# Altium PCB barricelli.PcbDoc (part 1 of 5)
Units mm, origin at the board's own origin, x right, y up, seen from the top; angles counter-clockwise.
Board outline 153 x 153 mm, 8 copper layers (Top Layer, PWR, Mid-Layer 1, Mid-Layer 2, Mid-Layer 3, Mid-Layer 4, GND, Bottom Layer); 168 components, 427 nets, 1233 pads, 911 vias.
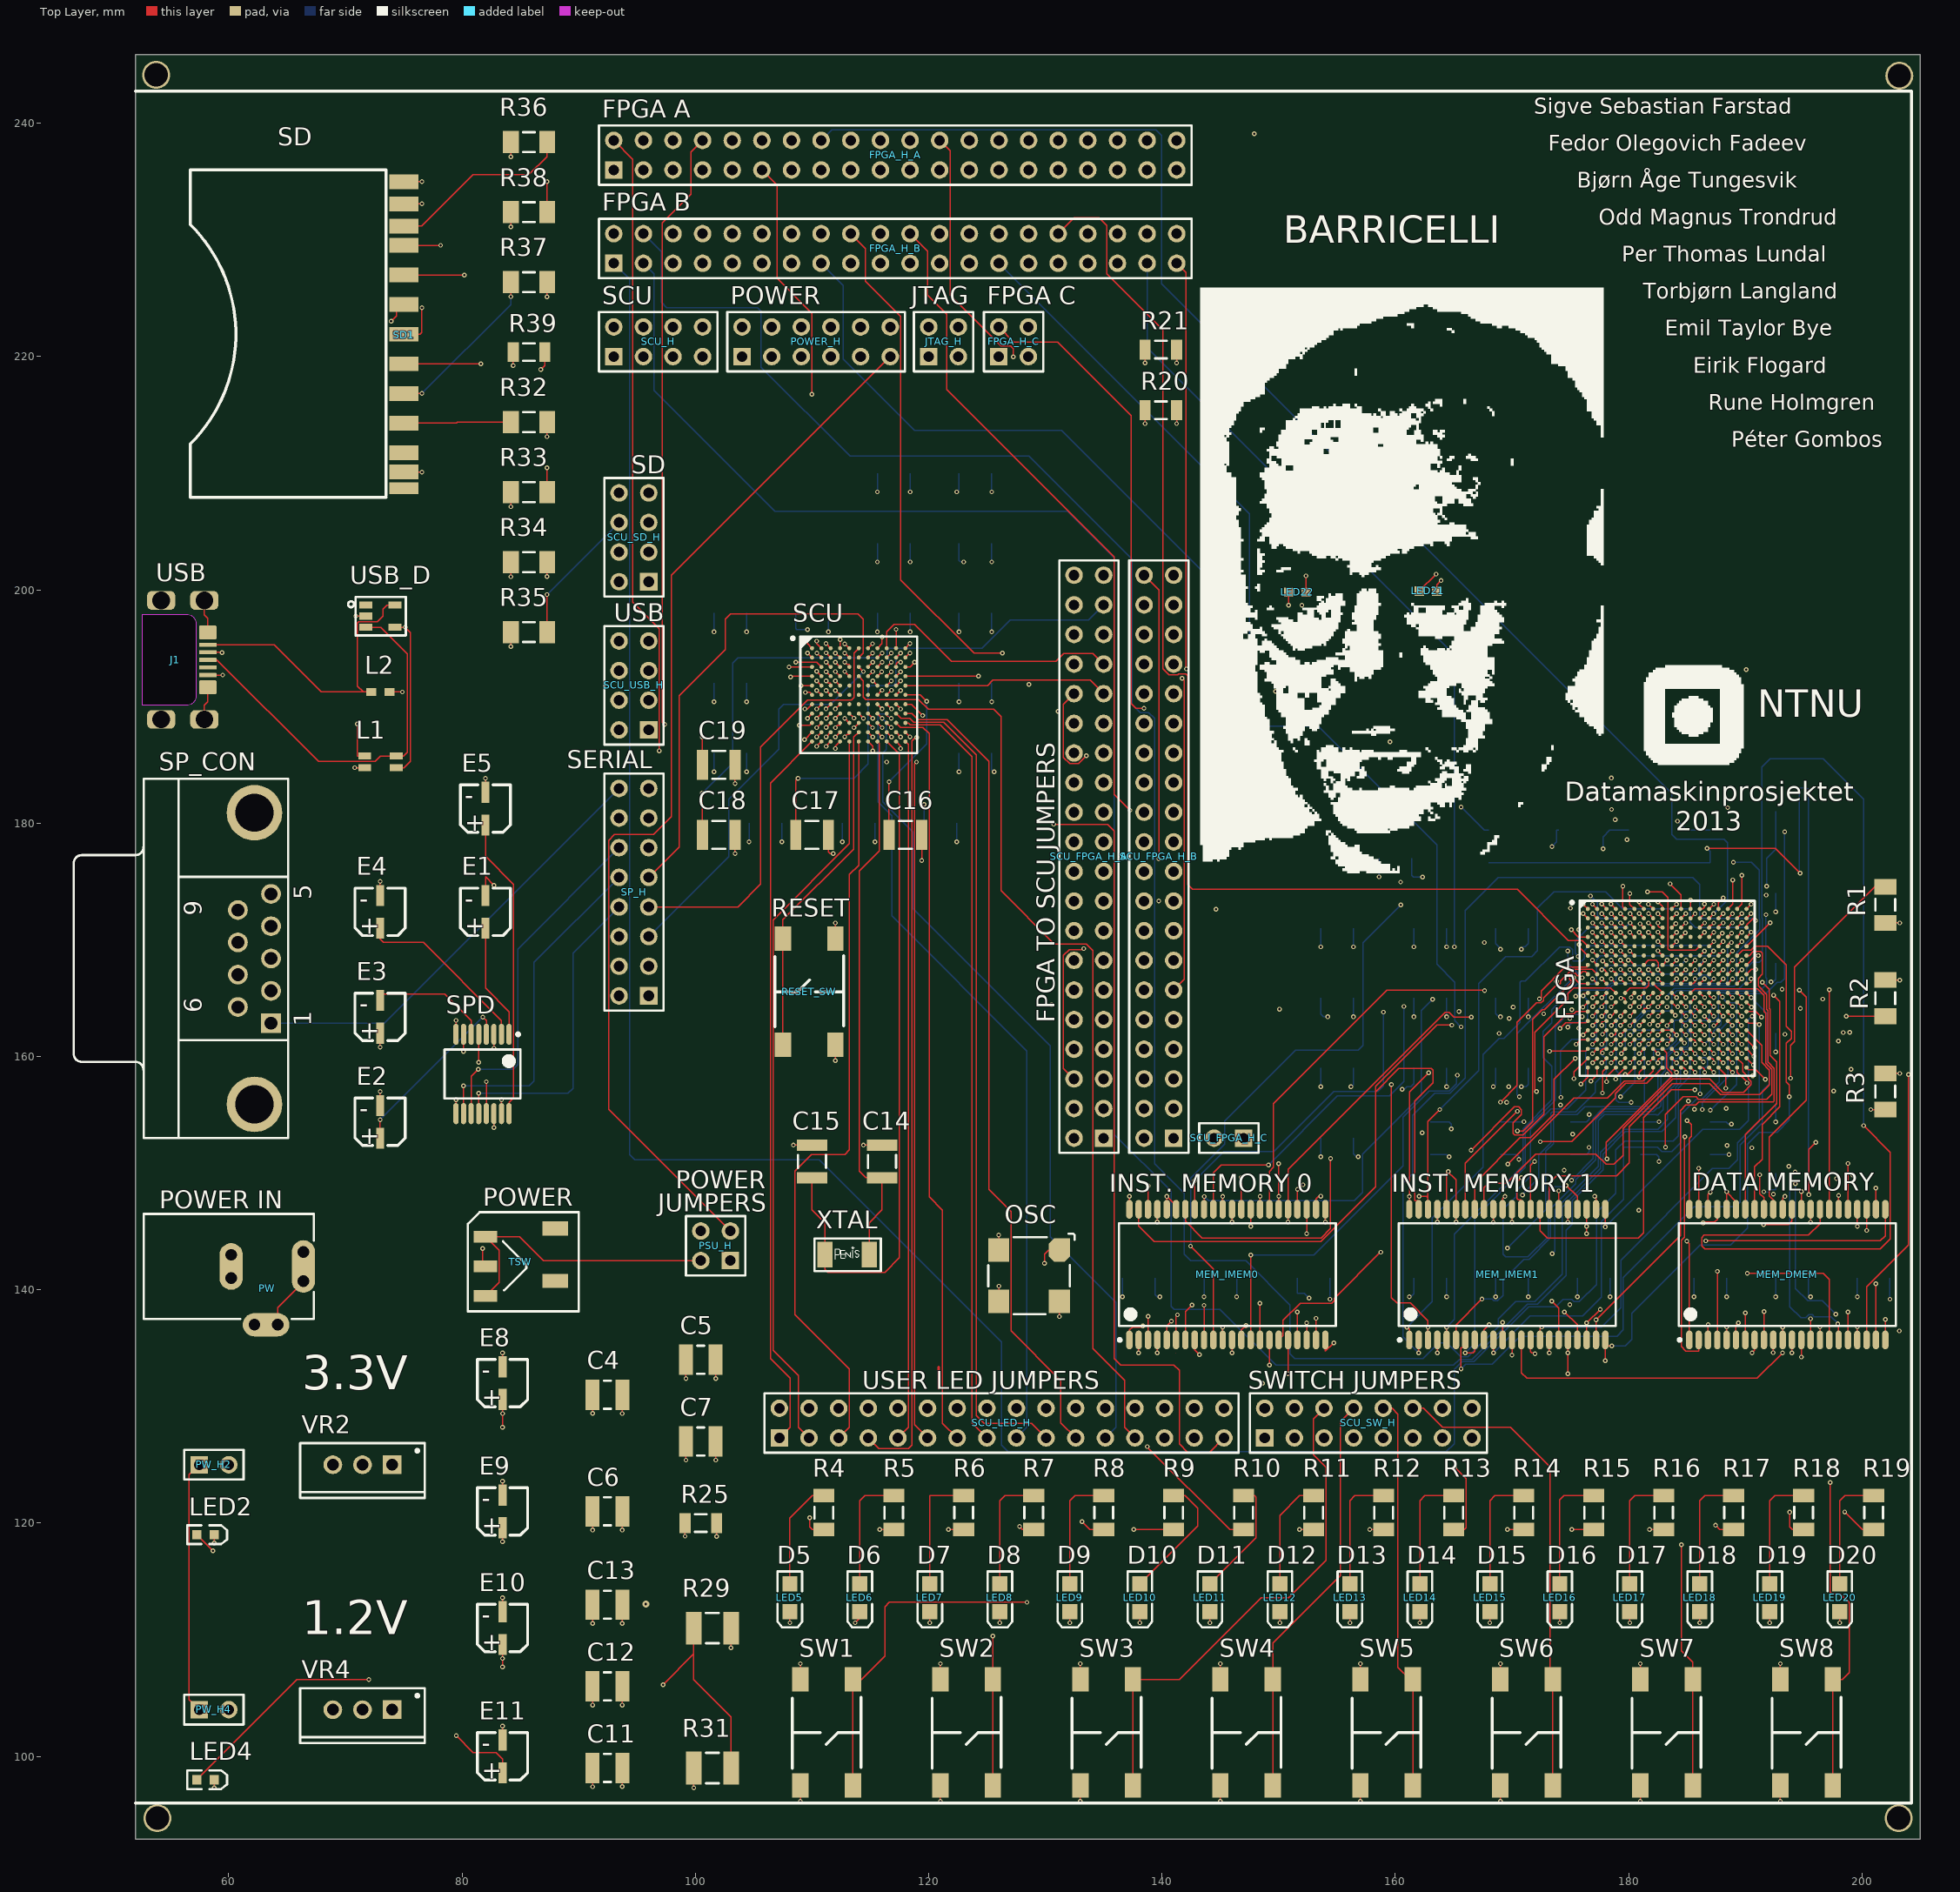
[diagram p0: Top Layer view]
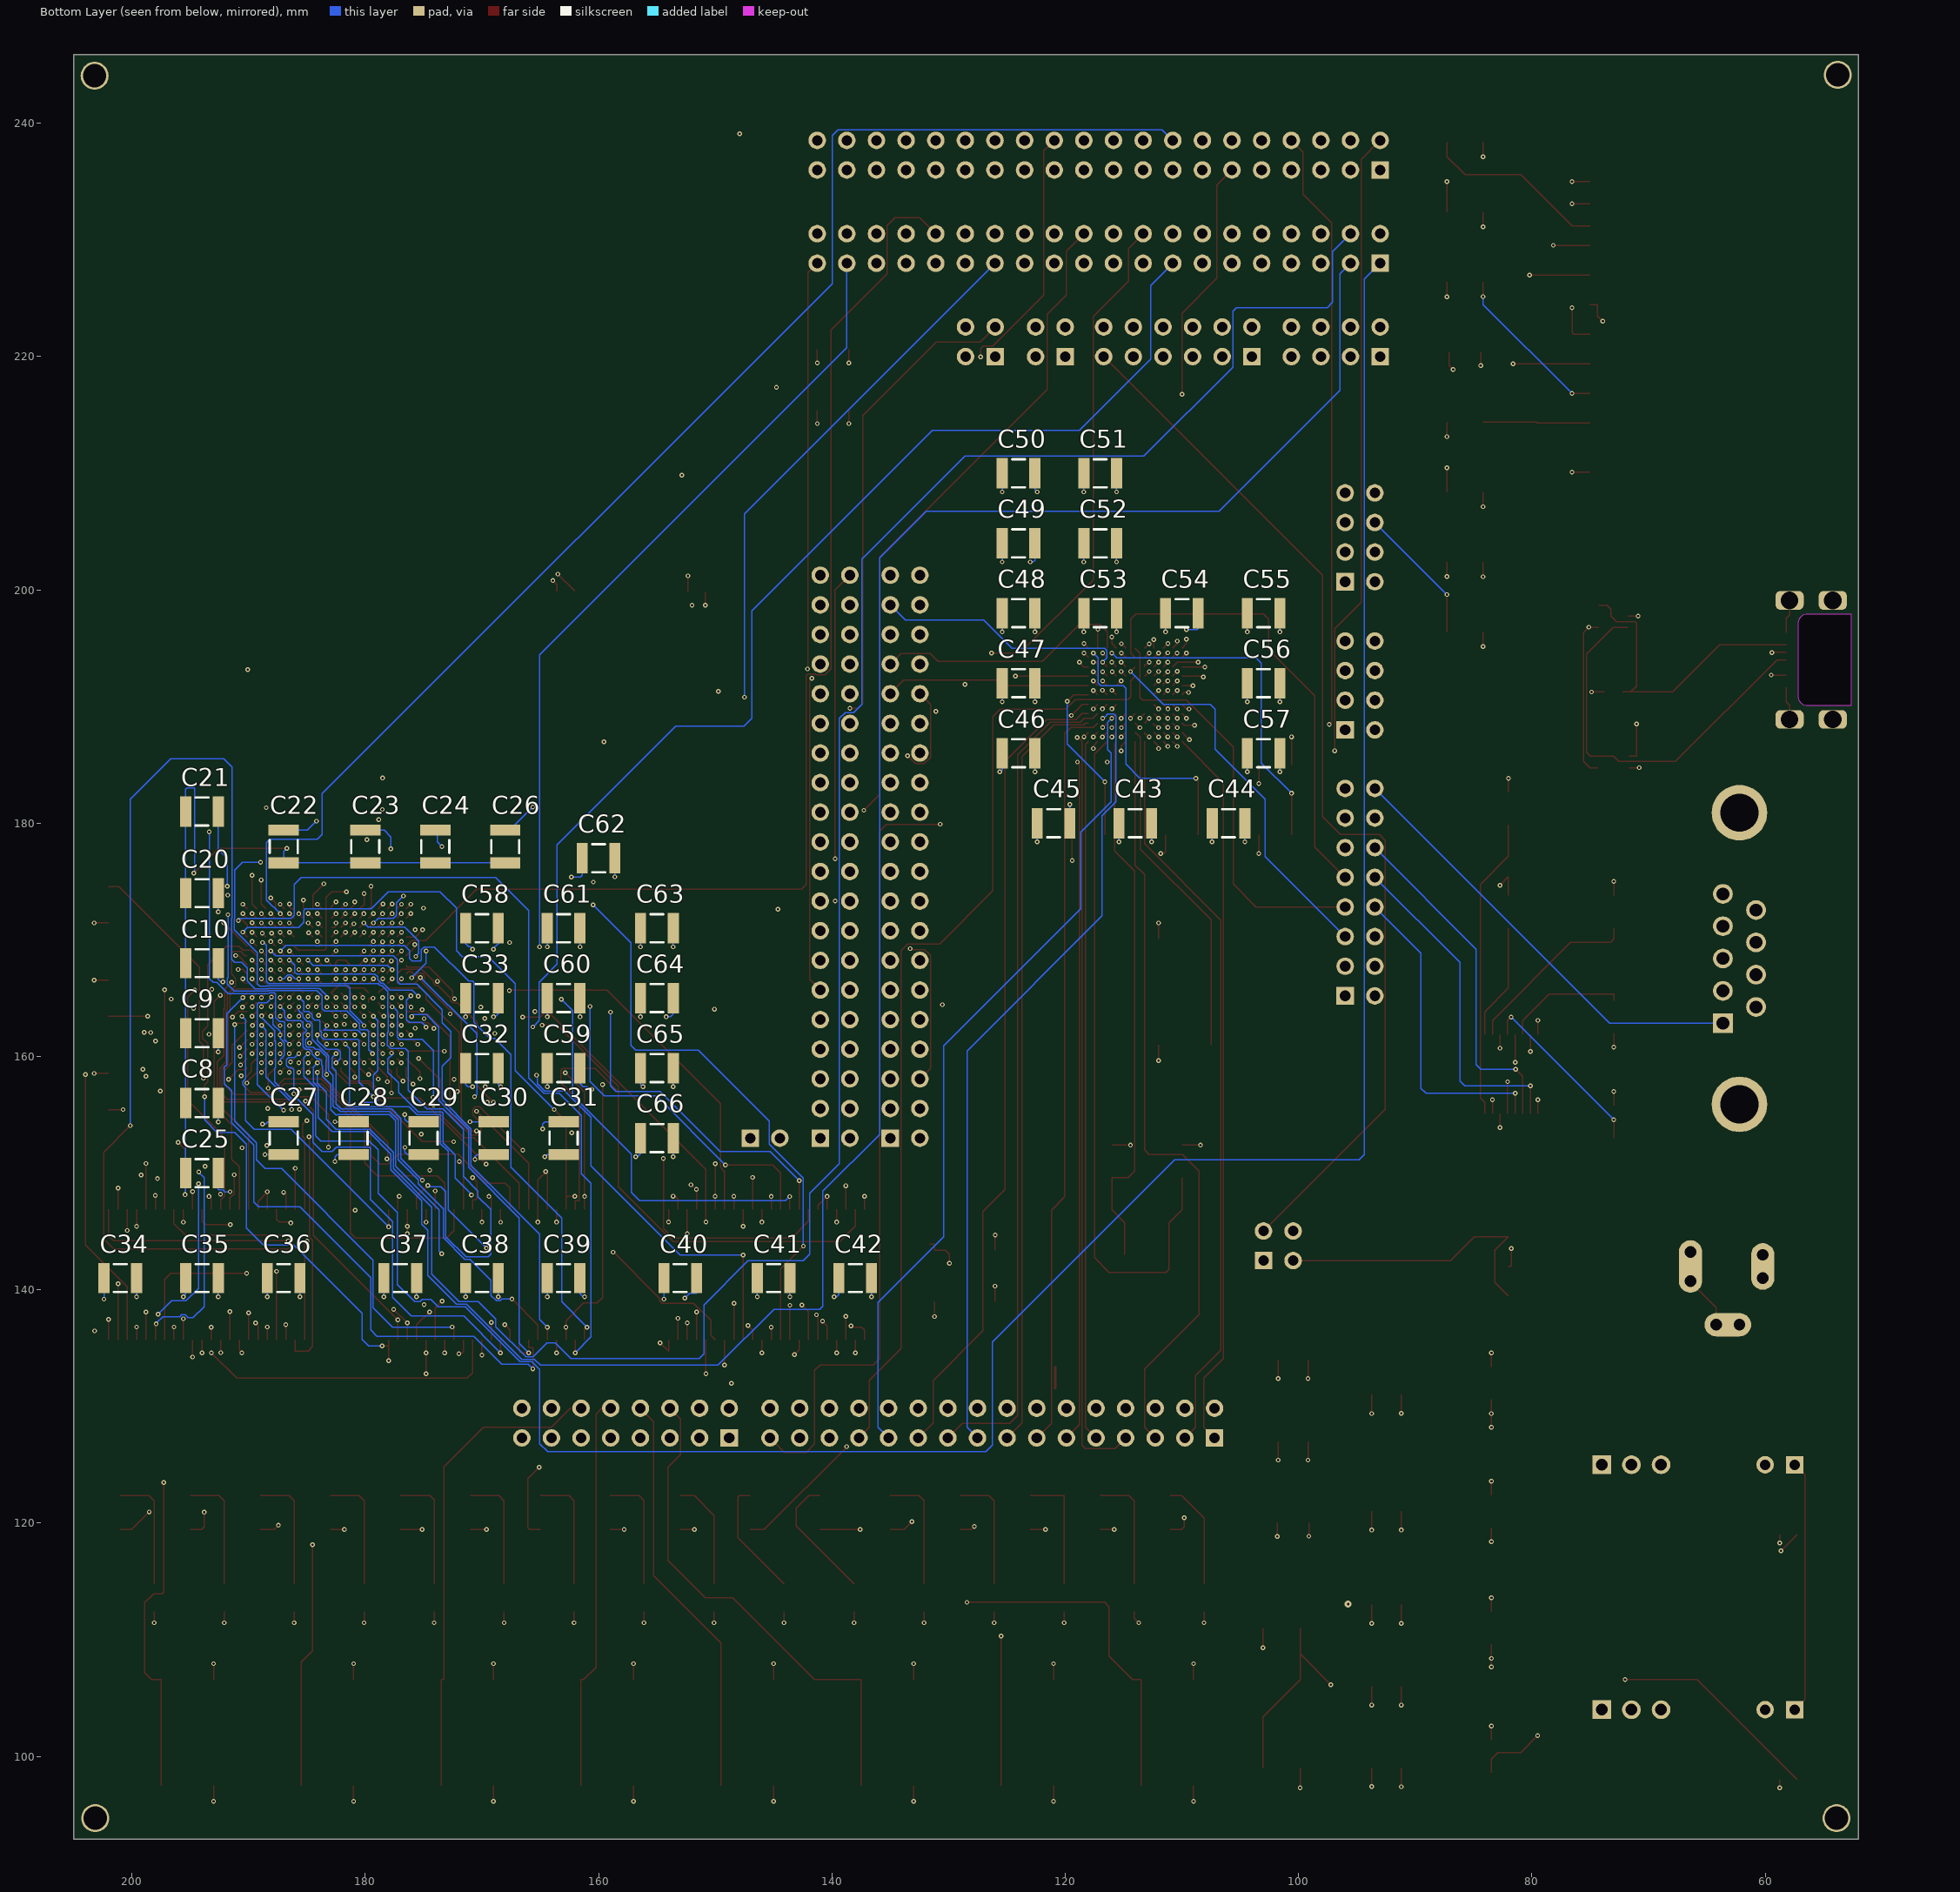
[diagram p1: Bottom Layer view, seen from below]
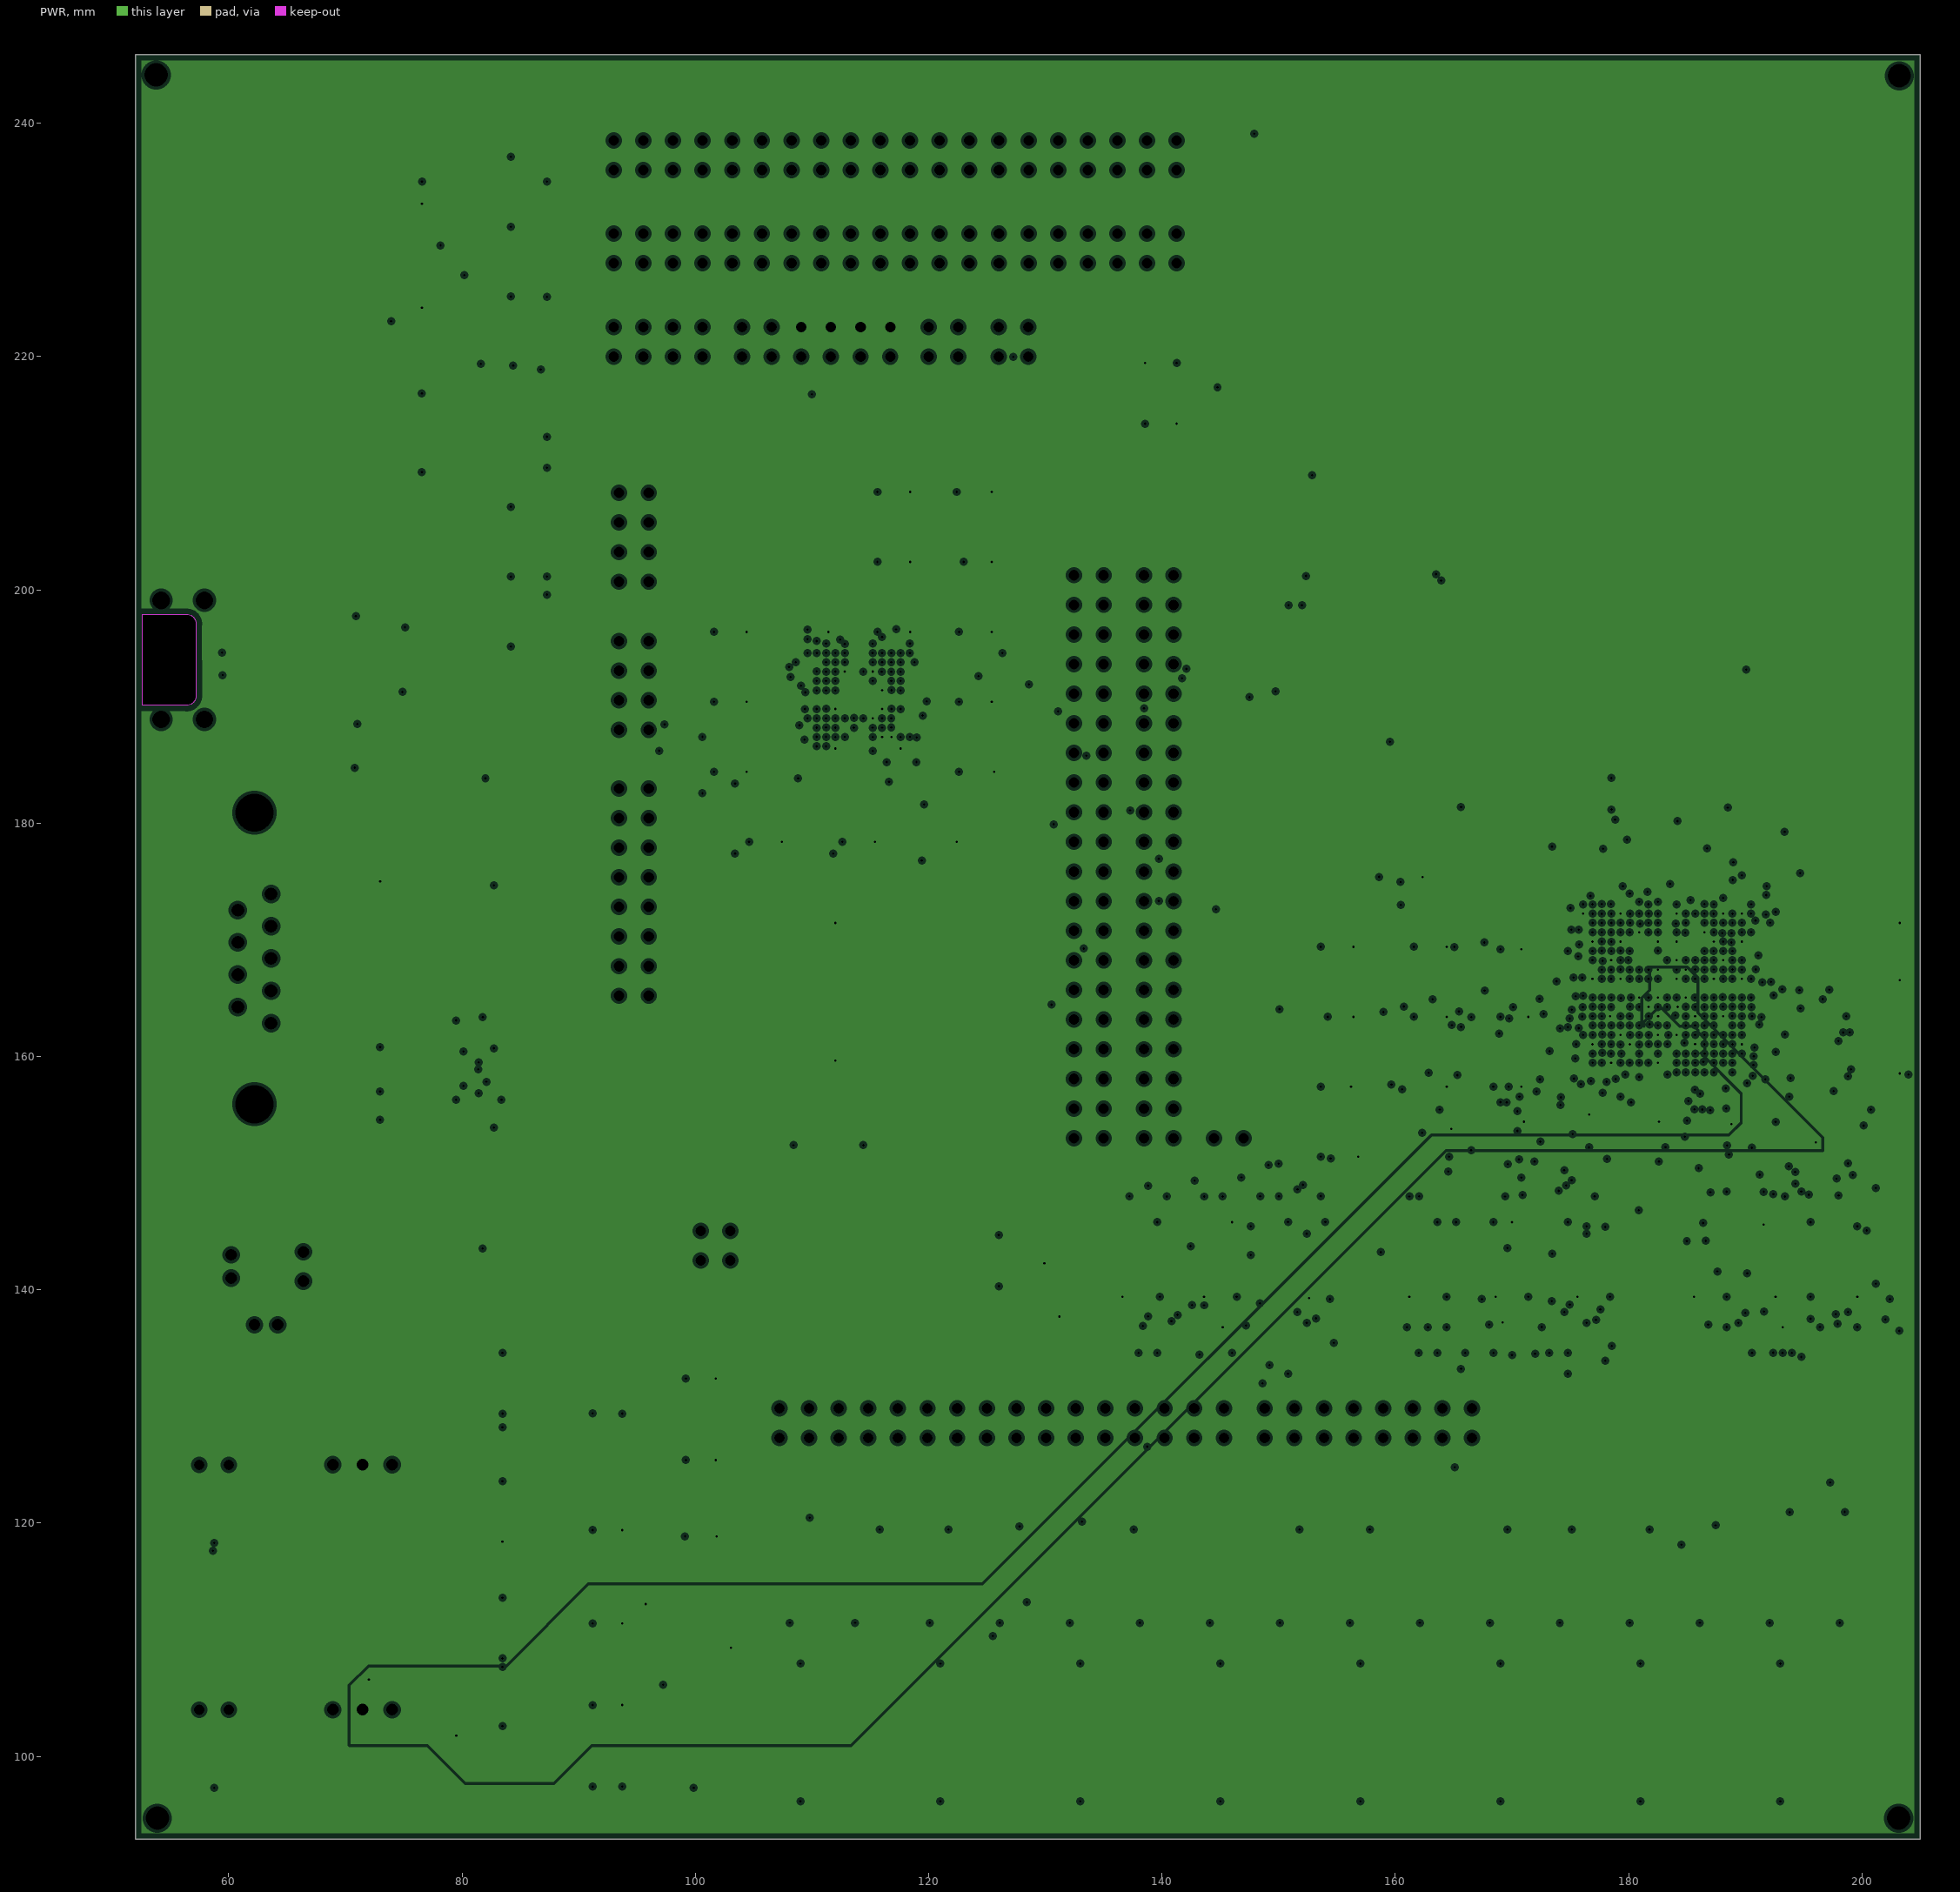
[diagram p2: PWR, clearances drawn from the general rule]
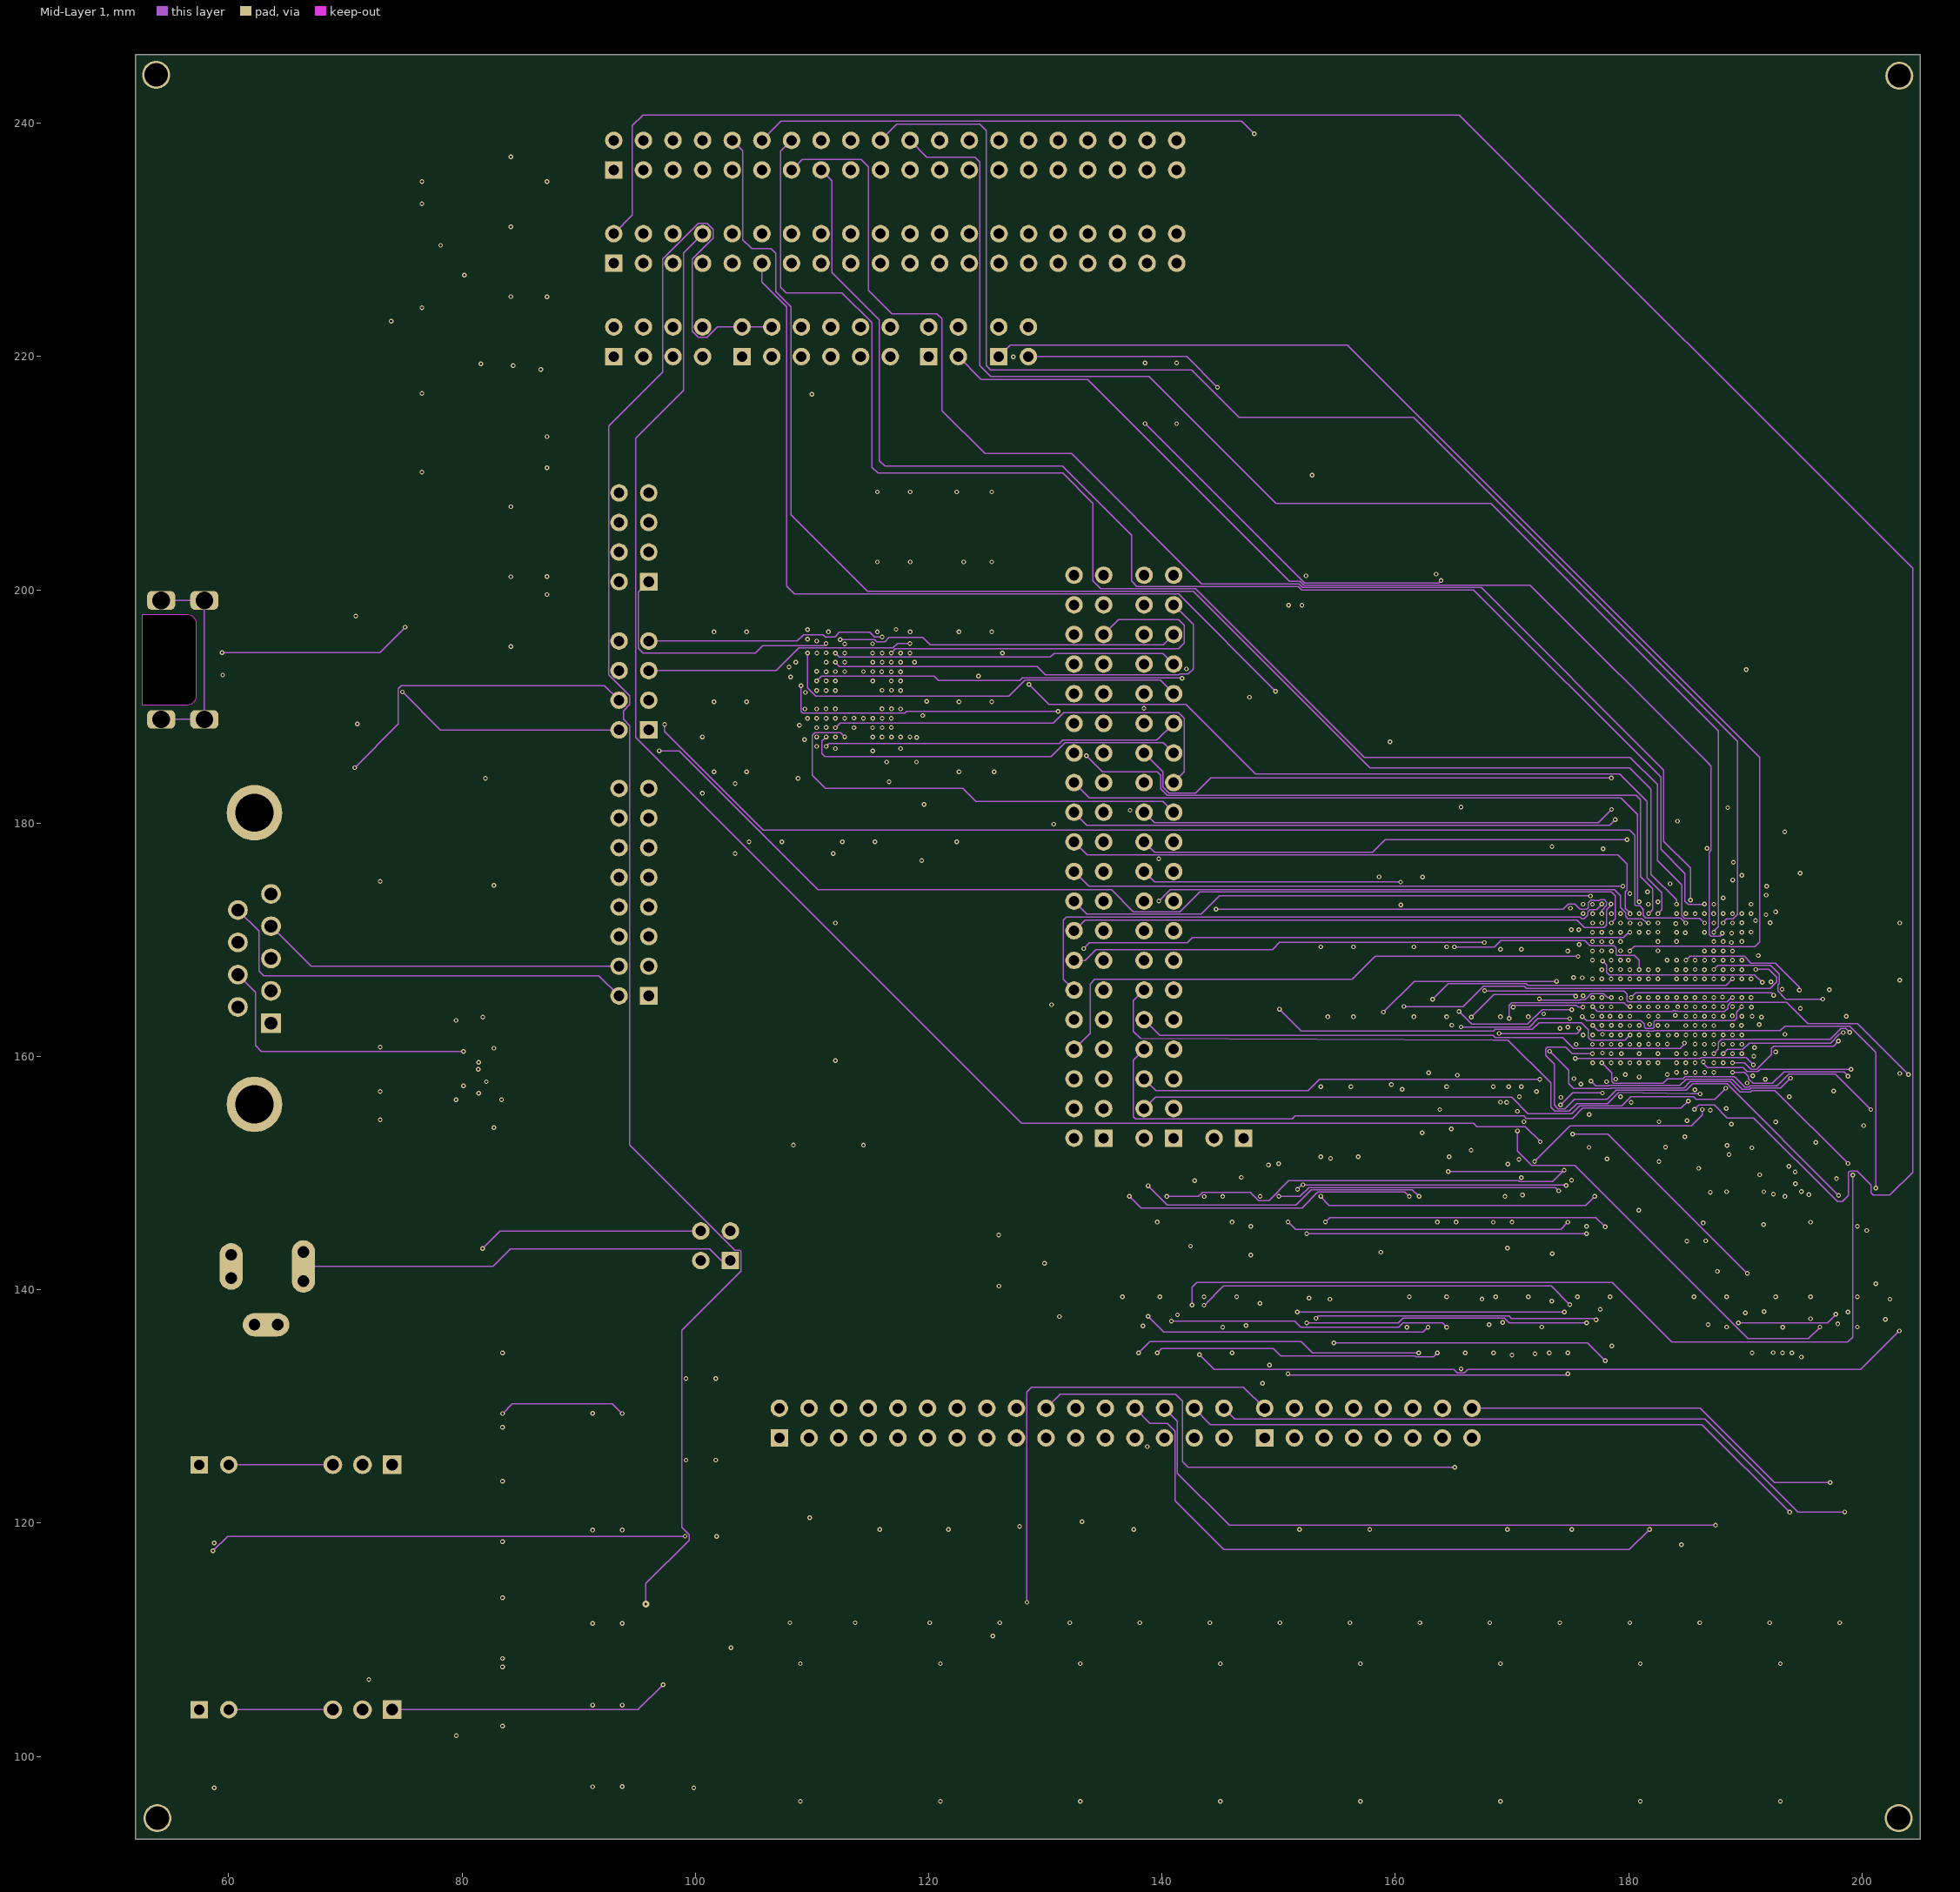
[diagram p3: Mid-Layer 1]
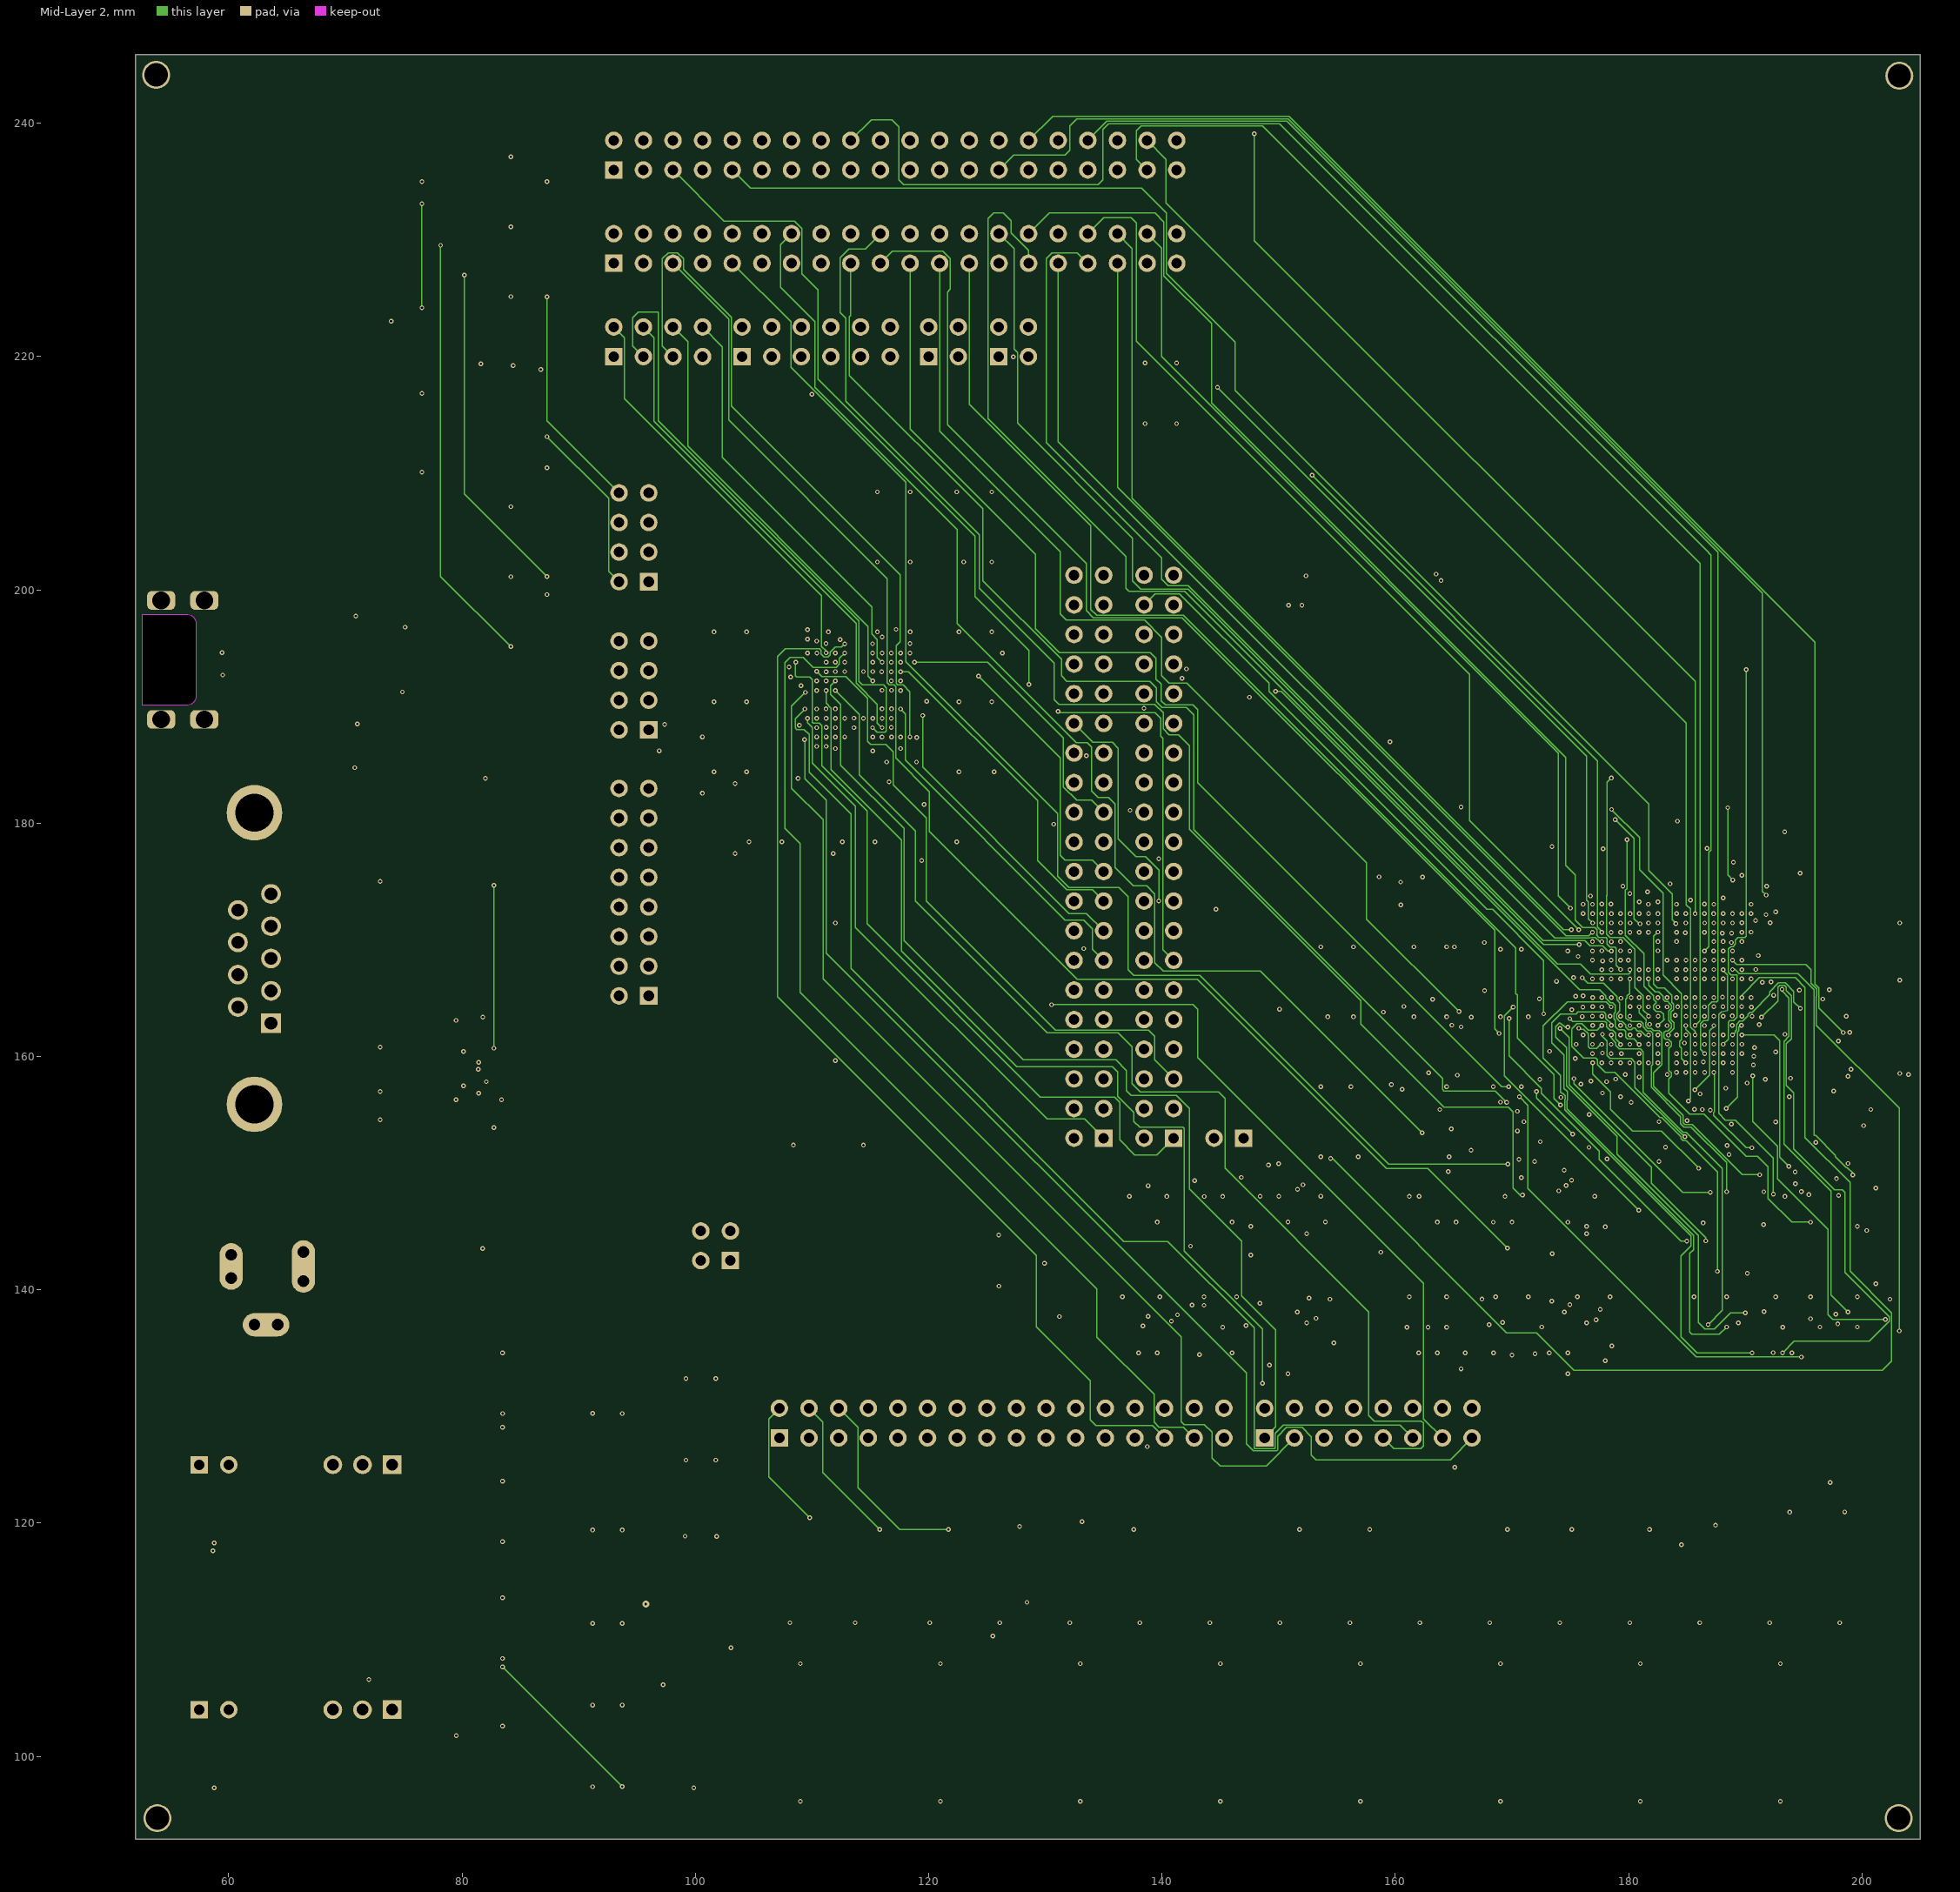
[diagram p4: Mid-Layer 2]
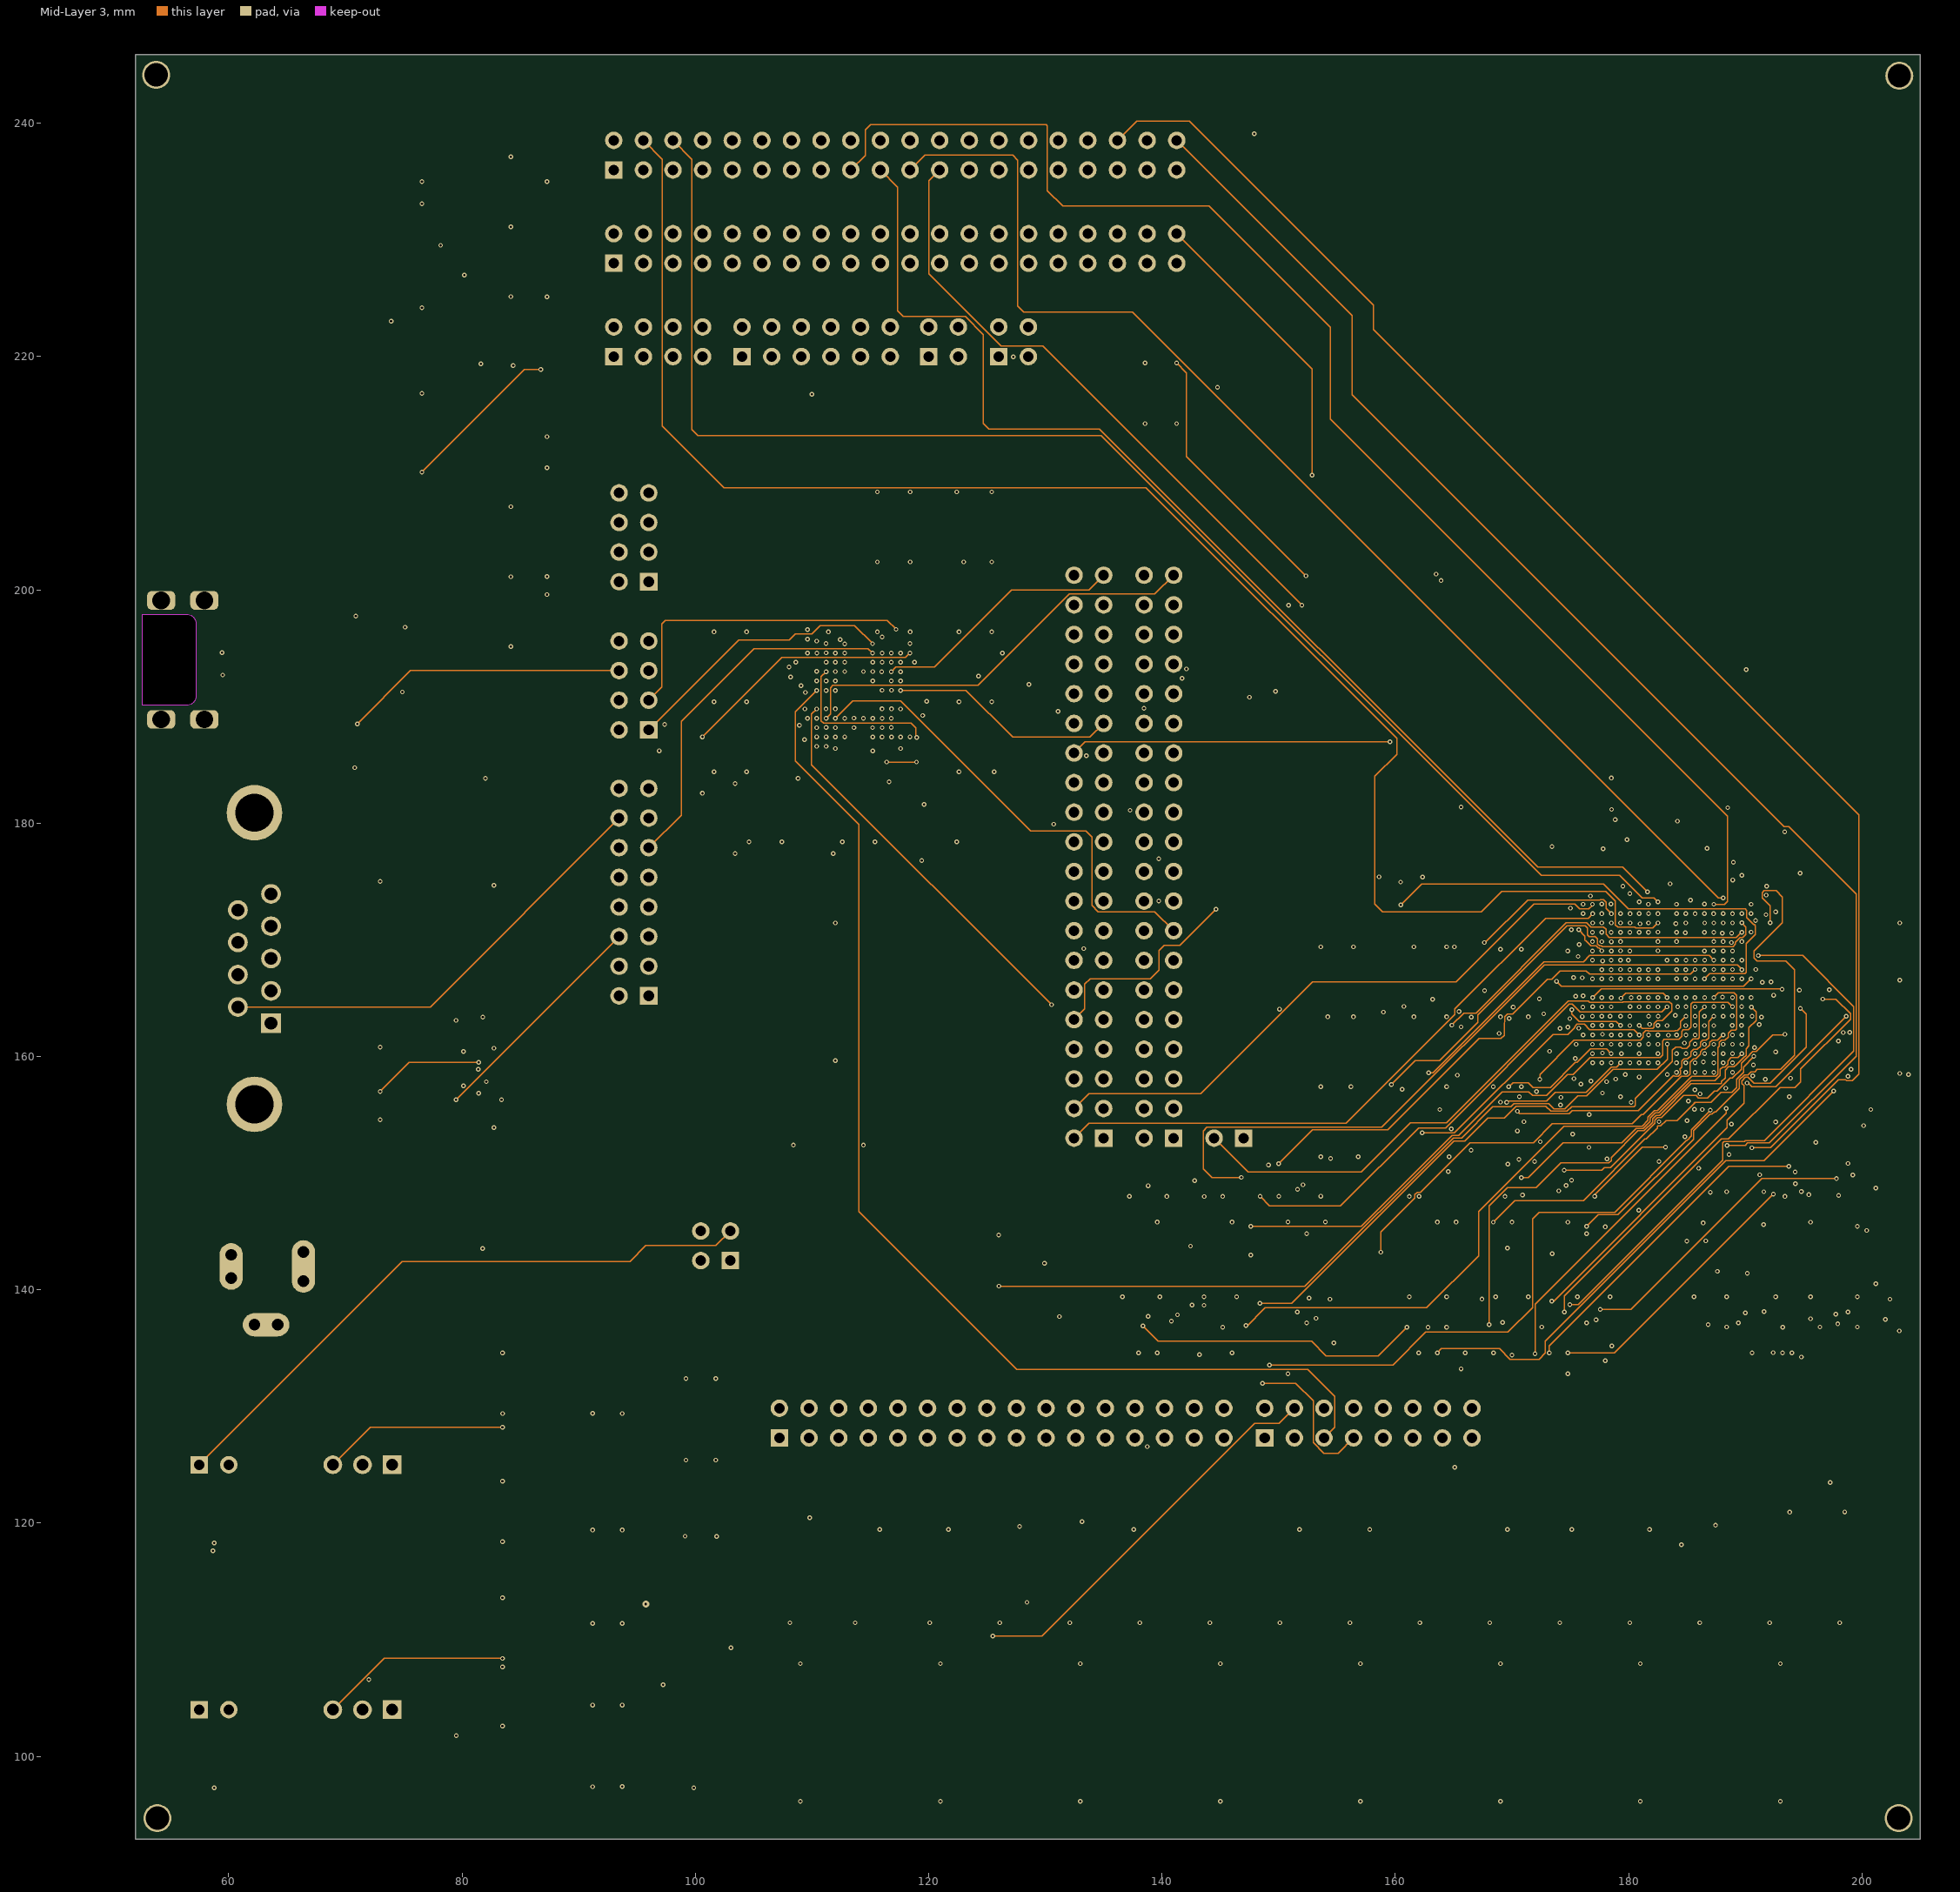
[diagram p5: Mid-Layer 3]
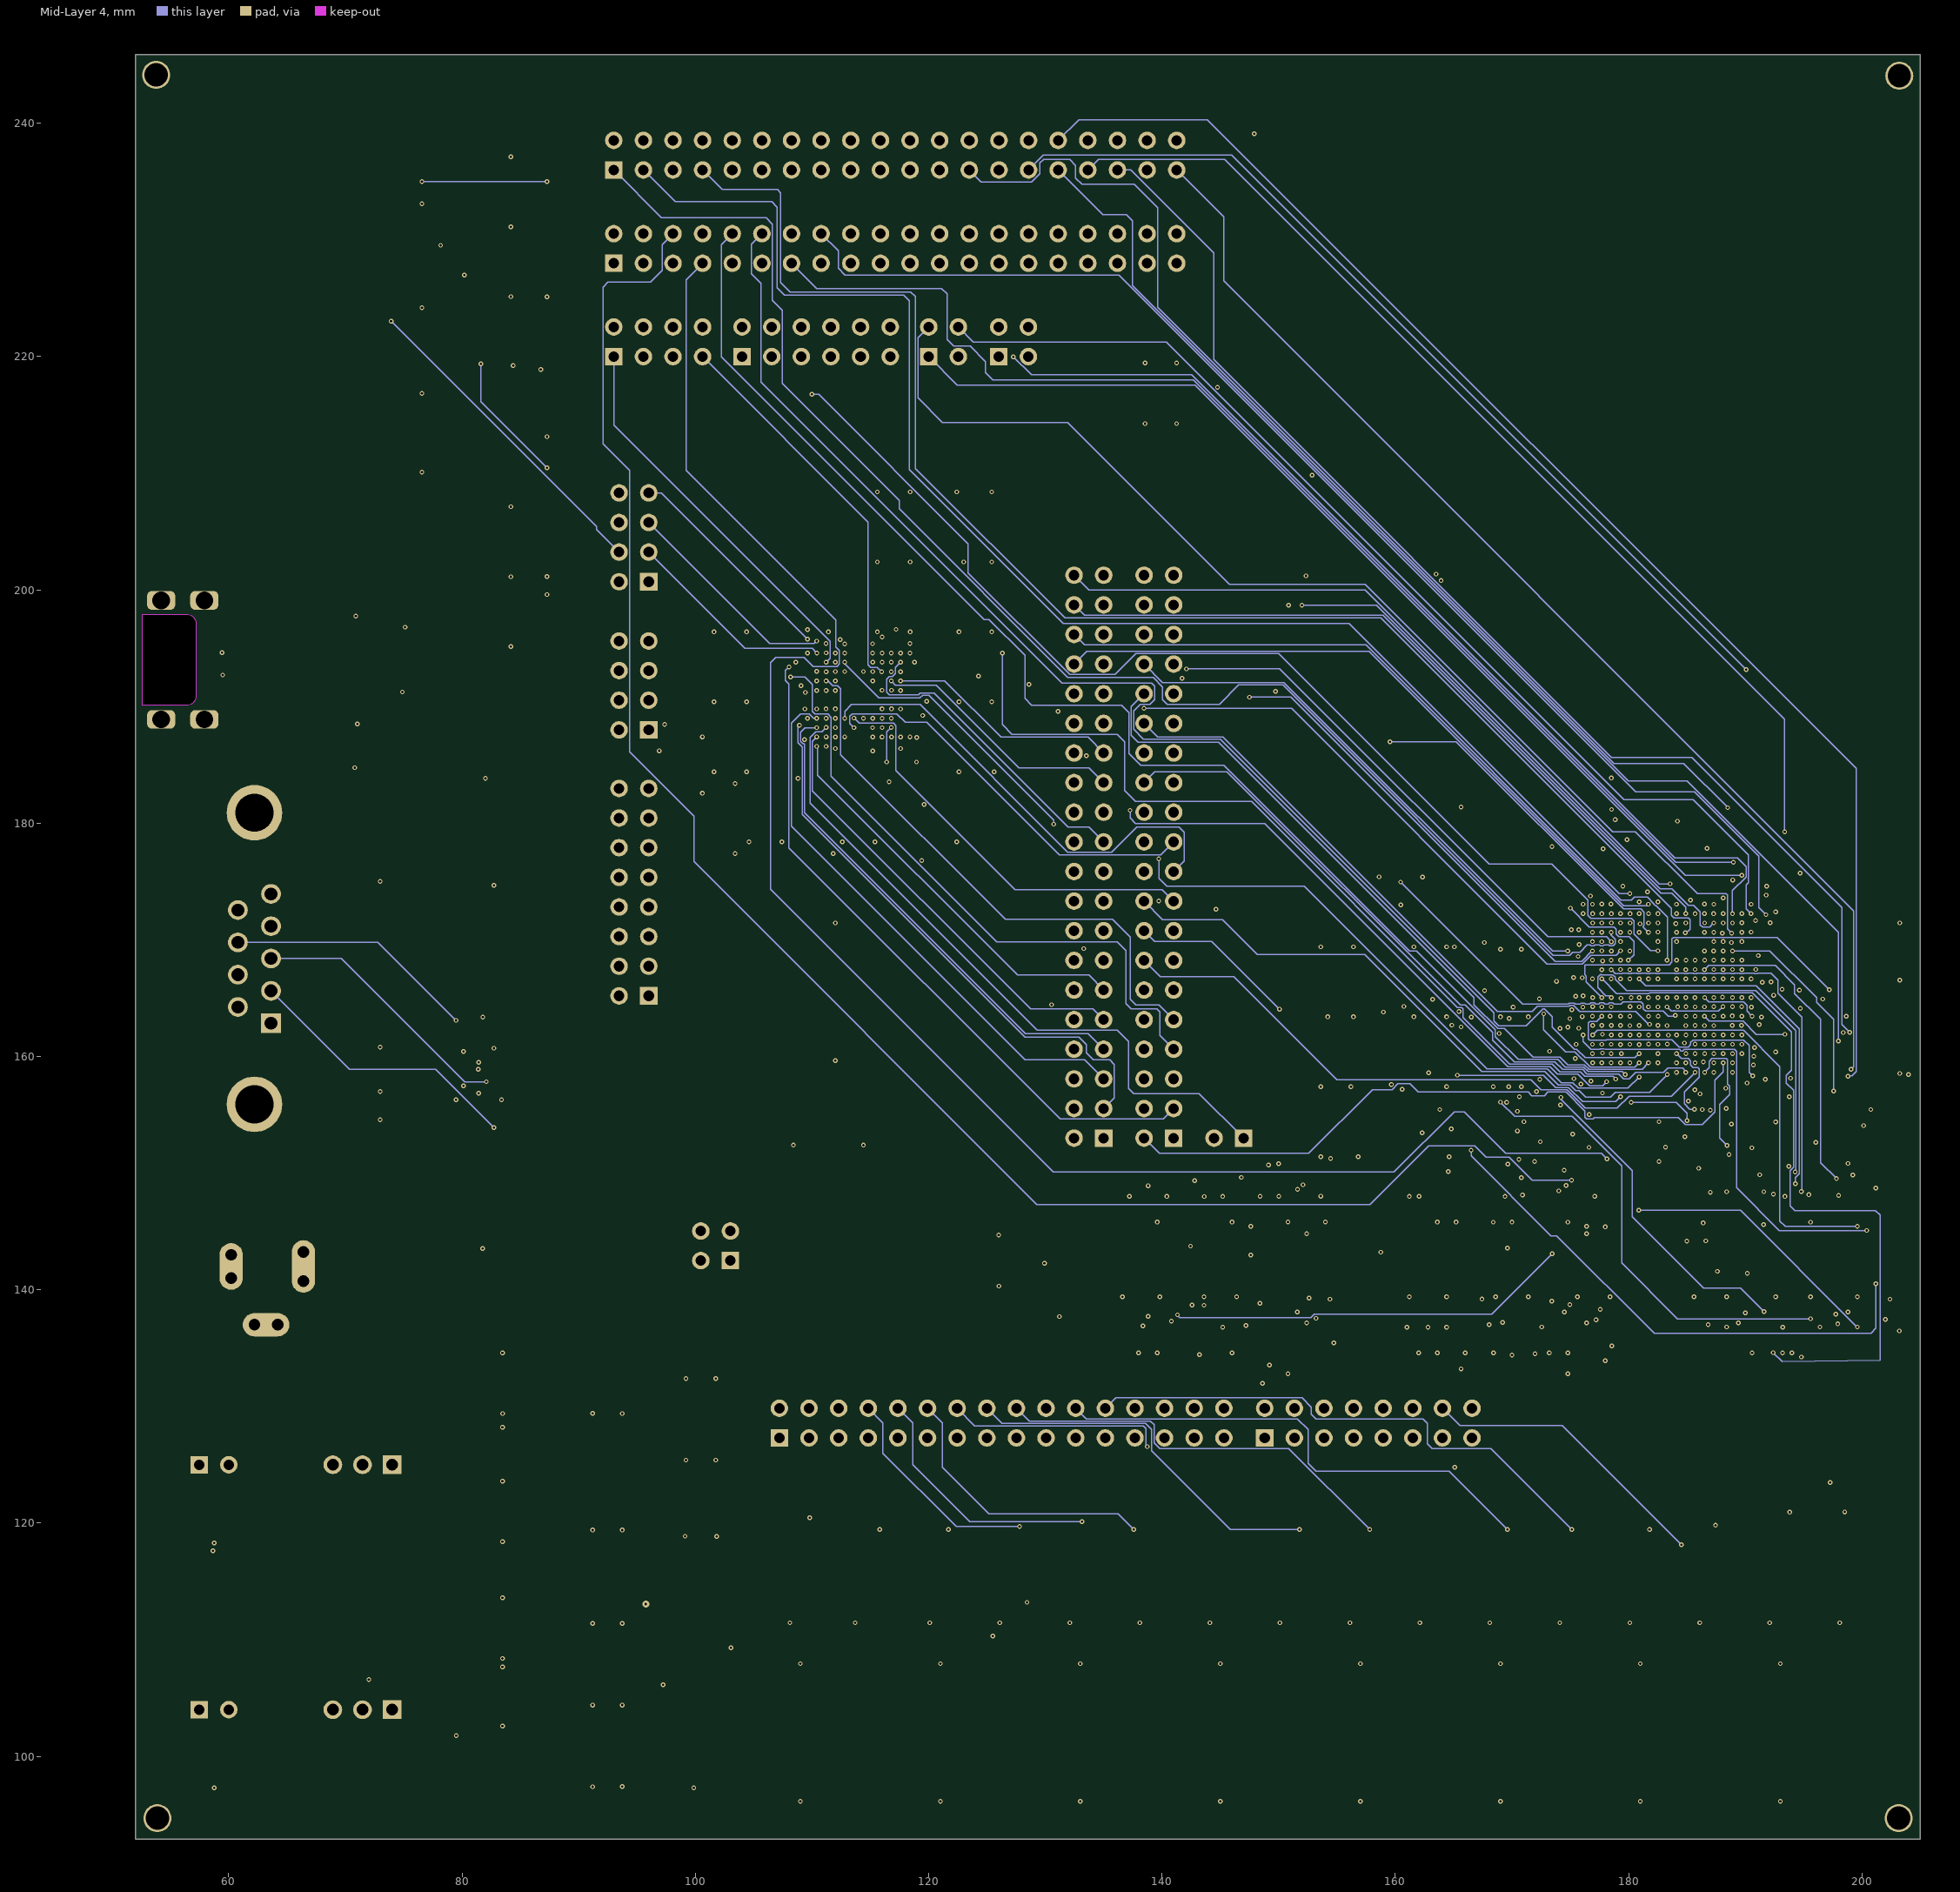
[diagram p6: Mid-Layer 4]
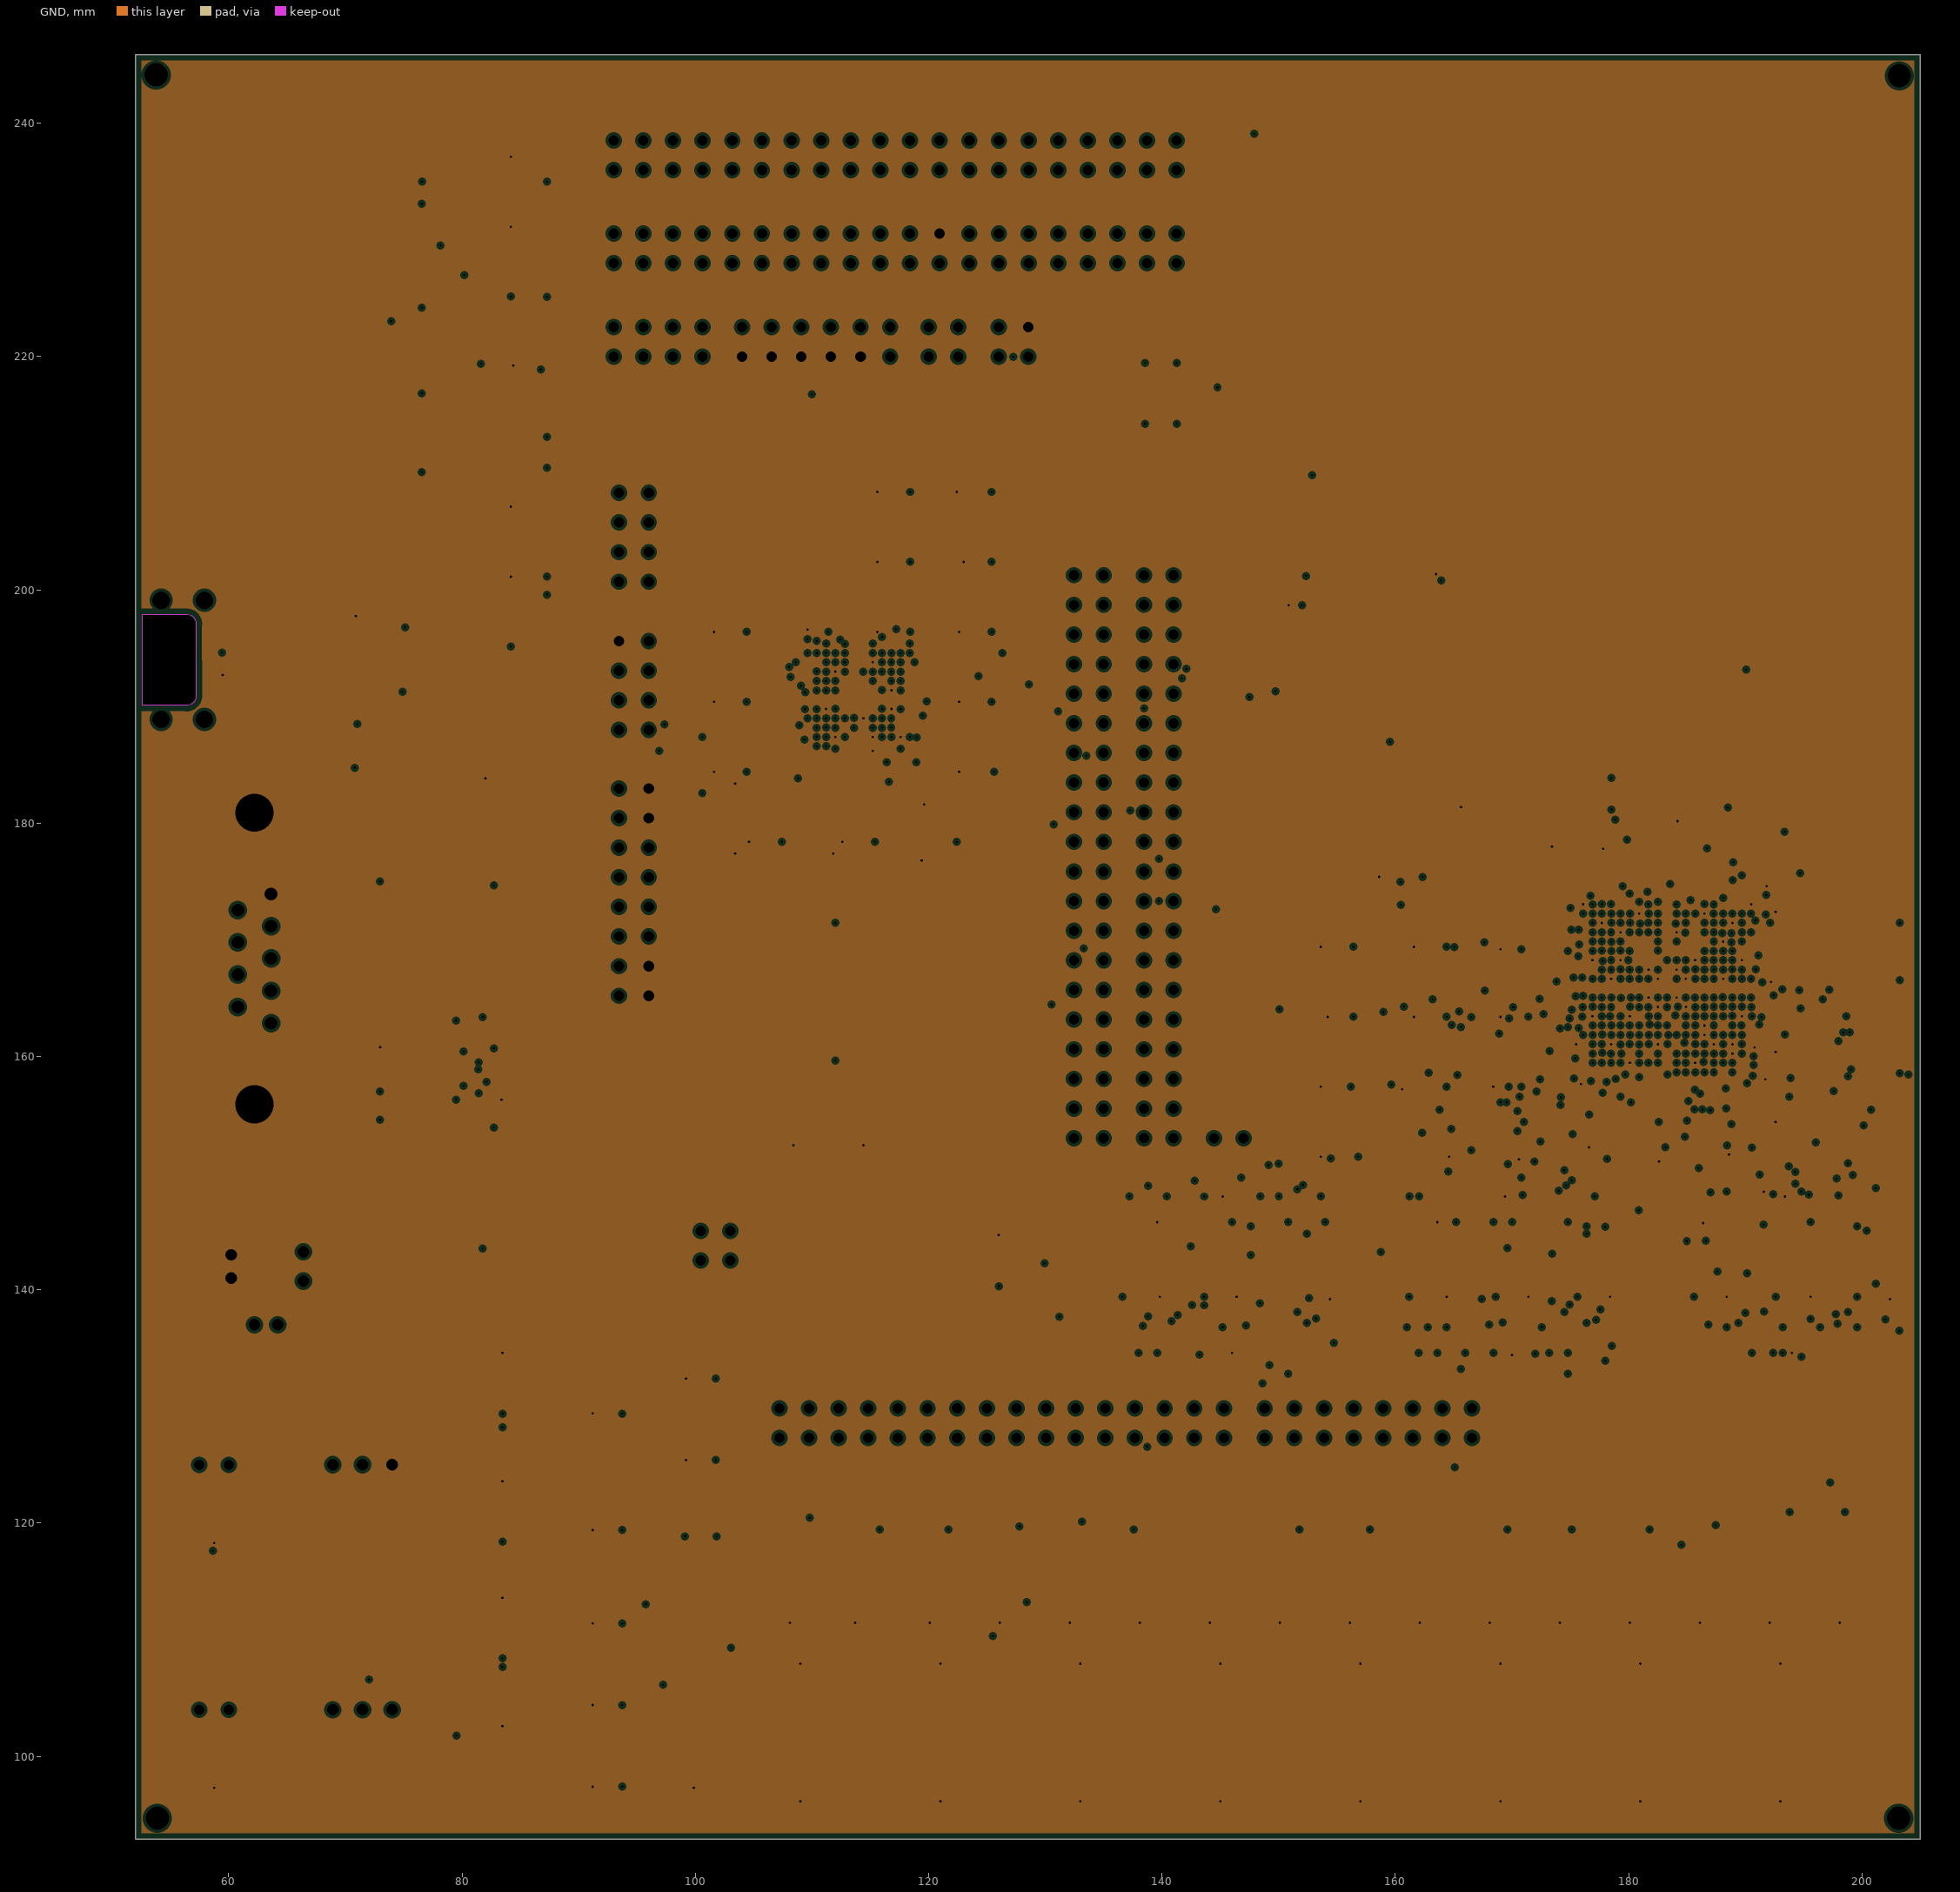
[diagram p7: GND, clearances drawn from the general rule]

## Layer stack, top to bottom
Top Layer: signal copper 0.0356
Dielectric: core 0.32, FR-4, Dk 4.8
PWR: plane copper 0.0356, net (Multiple Nets)
Dielectric: prepreg 0.32, FR-4, Dk 4.8
Mid-Layer 1: signal copper 0.0356
Dielectric: core 0.32, FR-4, Dk 4.8
Mid-Layer 2: signal copper 0.0356
Dielectric: prepreg 0.32, FR-4, Dk 4.8
Mid-Layer 3: signal copper 0.0356
Dielectric: core 0.32, FR-4, Dk 4.8
Mid-Layer 4: signal copper 0.0356
Dielectric: prepreg 0.32, FR-4, Dk 4.8
GND: plane copper 0.0356, net GND
Dielectric: core 0.32, FR-4, Dk 4.8
Bottom Layer: signal copper 0.0356

## Board outline
52,245.9 52,92.9 205,92.9 205,245.9

## Design rules (kind name [scope] priority, off if disabled: settings)
AssemblyTestpoint [(IsPad And (OnTopLayer Or OnBottomLayer)) Or (IsVia) Or (IsPad And OnMultiLayer)] p1: testpointundercomponent=TRUE minsize=1.016 maxsize=2.54 preferedsize=1.524 minholesize=0 maxholesize=1.016 preferedholesize=0.813 testpointgrid=0.025 usegrid=TRUE gridtolerance=0 allowsidetop=TRUE allowsidebottom=TRUE minspacing=0.05 compbodyclearance=0.1 boardedgeclearance=0.1
Clearance [All] p1: gap=0.1
Clearance BGA_clearance [IsTrack vs not IsVia] p2: gap=0.254
FabricationTestpoint [(IsPad And (OnTopLayer Or OnBottomLayer)) Or (IsVia) Or (IsPad And OnMultiLayer)] p1: side=3 testpointundercomponent=TRUE minsize=1.016 maxsize=2.54 preferedsize=1.524 minholesize=0 maxholesize=1.016 preferedholesize=0.813 testpointgrid=0.025 allowsidetop=TRUE allowsidebottom=TRUE usegrid=TRUE gridtolerance=0
HoleSize [All] p1: absolutevalues=TRUE maxlimit=5 minlimit=0.025 maxpercent=80.000 minpercent=20.000
MinimumSolderMaskSliver [All] p1: minsoldermaskwidth=0.03
PlaneClearance [All] p1: clearance=0.254
PlaneConnect [All] p1: planeconnectstyle=Direct reliefexpansion=0.508 reliefentries=4 reliefconductorwidth=0.254 reliefairgap=0.254
PolygonConnect [All] p1: connectstyle=Relief reliefconductorwidth=0.254 reliefentries=4 polygonreliefangle="90 Angle" airgapwidth=0.254
RoomDefinition U_decoupling [InComponentClass('U_decoupling')] p1: confinementstyle=ConfineIn formatcopy=TRUE lockcomponents=FALSE outline 0,0 50.8,0 50.8,25.4 0,25.4
RoomDefinition SCU [InComponentClass('SCU')] p2: confinementstyle=ConfineIn formatcopy=TRUE lockcomponents=FALSE outline 0,0 50.8,0 50.8,25.4 0,25.4
RoomDefinition HEADERS [InComponentClass('HEADERS')] p3: confinementstyle=ConfineIn formatcopy=TRUE lockcomponents=FALSE outline 0,0 50.8,0 50.8,25.4 0,25.4
RoomDefinition XTAL [InComponentClass('XTAL')] p4: confinementstyle=ConfineIn formatcopy=TRUE lockcomponents=FALSE outline 118,136 118,154 108,154 108,136
RoomDefinition USB [InComponentClass('USB')] p5: confinementstyle=ConfineIn formatcopy=TRUE lockcomponents=FALSE outline 51.6,200.2 51.6,184 83,184 83,200.2
RoomDefinition U_psu_toggle_switch [InComponentClass('U_psu_toggle_switch')] p6: confinementstyle=ConfineIn formatcopy=TRUE lockcomponents=FALSE outline 79.1,137.85 105.1,137.85 105.1,149.55 79.1,149.55
RoomDefinition U_microcontroller_reset_button [InComponentClass('U_microcontroller_reset_button')] p7: confinementstyle=ConfineIn formatcopy=TRUE lockcomponents=FALSE outline 106.5,159.7 114,159.7 114,174.2 106.5,174.2
RoomDefinition SW [InComponentClass('SW')] p8: confinementstyle=ConfineIn formatcopy=TRUE lockcomponents=FALSE outline 199.4,110.2 105.65,110.2 105.65,96 199.4,96
RoomDefinition SERIAL_PORT [InComponentClass('SERIAL_PORT')] p9: confinementstyle=ConfineIn formatcopy=TRUE lockcomponents=FALSE outline 52.975,152 98,152 98,183.775 52.975,183.775
RoomDefinition SD [InComponentClass('SD')] p10: confinementstyle=ConfineIn formatcopy=TRUE lockcomponents=FALSE outline 51.56,193.651 88.16,193.651 88.16,242.201 51.56,242.201
RoomDefinition PS [InComponentClass('PS')] p11: confinementstyle=ConfineIn formatcopy=TRUE lockcomponents=FALSE outline 52.36,96.1 105,96.1 105,152 52.36,152
RoomDefinition OSC [InComponentClass('OSC')] p12: confinementstyle=ConfineIn formatcopy=TRUE lockcomponents=FALSE outline 132.8,145.1 124.8,145.1 124.8,135.1 132.8,135.1
RoomDefinition LEDS_LOGO [InComponentClass('LEDS_LOGO')] p13: confinementstyle=ConfineIn formatcopy=TRUE lockcomponents=FALSE outline 143,174.1 205,174.1 205,243 143,243
RoomDefinition LEDS [InComponentClass('LEDS')] p14: confinementstyle=ConfineIn formatcopy=TRUE lockcomponents=FALSE outline 106.5,110.65 204,110.65 204,125.65 106.5,125.65
RoomDefinition IMEM1 [InComponentClass('IMEM1')] p15: confinementstyle=ConfineIn formatcopy=TRUE lockcomponents=FALSE outline 181,134 181,149 157,149 157,134
RoomDefinition IMEM0 [InComponentClass('IMEM0')] p16: confinementstyle=ConfineIn formatcopy=TRUE lockcomponents=FALSE outline 157,134 157,149 133,149 133,134
RoomDefinition FPGA [InComponentClass('FPGA')] p17: confinementstyle=ConfineIn formatcopy=TRUE lockcomponents=FALSE outline 161.7,149 205,149 205,179 161.7,179
RoomDefinition DMEM [InComponentClass('DMEM')] p18: confinementstyle=ConfineIn formatcopy=TRUE lockcomponents=FALSE outline 205,134 205,149 181,149 181,134
RoutingVias [All] p1: holewidth=0.2 width=0.4 viastyle="Through Hole" minholewidth=0.1 minwidth=0.35 maxholewidth=0.2 maxwidth=0.6
SMDNeckDown [All] p1: percent=100.000
SilkToSilkClearance [All] p1 off: silktosilkclearance=0.254
SilkToSolderMaskClearance [IsPad] p1: minsilkscreentomaskgap=0.06 clearancetoexposedcopper=TRUE
SilkToSolderMaskClearance SilkscreenOverComponentPads [IsPad] p2: minsilkscreentomaskgap=0.06 clearancetoexposedcopper=TRUE
SolderMaskExpansion SolderMaskExpansion_2 [(HasFootprint('ENMR-BGA112') OR HasFootprint('CSG324'))] p1: expansion=0.08
SolderMaskExpansion SolderMaskExpansion_1 [(IsVia)] p2: expansion=0.05
SolderMaskExpansion SolderMaskExpansion_FPGA_BGA_Breakout [All] p3: expansion=0.102
Width [All] p1: maxlimit=5 minlimit=0.1 preferedwidth=0.1 minimp=50.000000 maximp=50.000000 favimp=50.000000
20 further rules are at their usual default settings.

## Classes and differential pairs
channel class memorychip_schematic: DMEM IMEM0 IMEM1
net class SW[0..7]: SW0 SW1 SW2 SW3 SW4 SW5 SW6 SW7
net class LED[0..15]: LED0 LED1 LED2 LED3 LED4 LED5 LED6 LED7 LED8 LED9 LED10 LED11 LED12 LED13 LED14 LED15
net class INST_MEM1.BUS[0..15]: INST_MEM1.BUS0 INST_MEM1.BUS1 INST_MEM1.BUS2 INST_MEM1.BUS3 INST_MEM1.BUS4 INST_MEM1.BUS5 INST_MEM1.BUS6 INST_MEM1.BUS7 INST_MEM1.BUS8 INST_MEM1.BUS9 INST_MEM1.BUS10 INST_MEM1.BUS11 INST_MEM1.BUS12 INST_MEM1.BUS13 INST_MEM1.BUS14 INST_MEM1.BUS15
net class INST_MEM0.BUS[0..15]: INST_MEM0.BUS0 INST_MEM0.BUS1 INST_MEM0.BUS2 INST_MEM0.BUS3 INST_MEM0.BUS4 INST_MEM0.BUS5 INST_MEM0.BUS6 INST_MEM0.BUS7 INST_MEM0.BUS8 INST_MEM0.BUS9 INST_MEM0.BUS10 INST_MEM0.BUS11 INST_MEM0.BUS12 INST_MEM0.BUS13 INST_MEM0.BUS14 INST_MEM0.BUS15
net class FPGA_INSTADDR[0..18]: FPGA_INSTADDR0 FPGA_INSTADDR1 FPGA_INSTADDR2 FPGA_INSTADDR3 FPGA_INSTADDR4 FPGA_INSTADDR5 FPGA_INSTADDR6 FPGA_INSTADDR7 FPGA_INSTADDR8 FPGA_INSTADDR9 FPGA_INSTADDR10 FPGA_INSTADDR11 FPGA_INSTADDR12 FPGA_INSTADDR13 FPGA_INSTADDR14 FPGA_INSTADDR15 FPGA_INSTADDR16 FPGA_INSTADDR17 FPGA_INSTADDR18
net class FPGA_HEADER[0..83]: FPGA_HEADER0 FPGA_HEADER1 FPGA_HEADER2 FPGA_HEADER3 FPGA_HEADER4 FPGA_HEADER5 FPGA_HEADER6 FPGA_HEADER7 FPGA_HEADER8 FPGA_HEADER9 FPGA_HEADER10 FPGA_HEADER11 FPGA_HEADER12 FPGA_HEADER13 FPGA_HEADER14 FPGA_HEADER15 FPGA_HEADER16 FPGA_HEADER17 FPGA_HEADER18 FPGA_HEADER19 FPGA_HEADER20 FPGA_HEADER21 FPGA_HEADER22 FPGA_HEADER23 FPGA_HEADER24 FPGA_HEADER25 FPGA_HEADER26 FPGA_HEADER27 FPGA_HEADER28 FPGA_HEADER29 FPGA_HEADER30 FPGA_HEADER31 FPGA_HEADER32 FPGA_HEADER33 FPGA_HEADER34 FPGA_HEADER35 FPGA_HEADER36 FPGA_HEADER37 FPGA_HEADER38 FPGA_HEADER39 FPGA_HEADER40 FPGA_HEADER41 FPGA_HEADER42 FPGA_HEADER43 FPGA_HEADER44 FPGA_HEADER45 FPGA_HEADER46 FPGA_HEADER47 FPGA_HEADER48 FPGA_HEADER49 FPGA_HEADER50 FPGA_HEADER51 FPGA_HEADER52 FPGA_HEADER53 FPGA_HEADER54 FPGA_HEADER55 FPGA_HEADER56 FPGA_HEADER57 FPGA_HEADER58 FPGA_HEADER59 FPGA_HEADER60 FPGA_HEADER61 FPGA_HEADER62 FPGA_HEADER64 FPGA_HEADER65 FPGA_HEADER66 FPGA_HEADER67 FPGA_HEADER68 FPGA_HEADER69 FPGA_HEADER70 FPGA_HEADER71 FPGA_HEADER72 FPGA_HEADER73 FPGA_HEADER74 FPGA_HEADER75 FPGA_HEADER76 FPGA_HEADER77 FPGA_HEADER78 FPGA_HEADER79 FPGA_HEADER80 FPGA_HEADER81 FPGA_HEADER82 FPGA_HEADER83
net class FPGA.BUS[0..15]: FPGA.BUS0 FPGA.BUS1 FPGA.BUS2 FPGA.BUS3 FPGA.BUS4 FPGA.BUS5 FPGA.BUS6 FPGA.BUS7 FPGA.BUS8 FPGA.BUS9 FPGA.BUS10 FPGA.BUS11 FPGA.BUS12 FPGA.BUS13 FPGA.BUS14 FPGA.BUS15
net class FPGA.ADDR[0..18]: FPGA.ADDR0 FPGA.ADDR1 FPGA.ADDR2 FPGA.ADDR3 FPGA.ADDR4 FPGA.ADDR5 FPGA.ADDR6 FPGA.ADDR7 FPGA.ADDR8 FPGA.ADDR9 FPGA.ADDR10 FPGA.ADDR11 FPGA.ADDR12 FPGA.ADDR13 FPGA.ADDR14 FPGA.ADDR15 FPGA.ADDR16 FPGA.ADDR17 FPGA.ADDR18
net class DATA_MEM.BUS[0..15]: DATA_MEM.BUS0 DATA_MEM.BUS1 DATA_MEM.BUS2 DATA_MEM.BUS3 DATA_MEM.BUS4 DATA_MEM.BUS5 DATA_MEM.BUS6 DATA_MEM.BUS7 DATA_MEM.BUS8 DATA_MEM.BUS9 DATA_MEM.BUS10 DATA_MEM.BUS11 DATA_MEM.BUS12 DATA_MEM.BUS13 DATA_MEM.BUS14 DATA_MEM.BUS15
net class DATA_MEM.ADDR[0..18]: DATA_MEM.ADDR0 DATA_MEM.ADDR1 DATA_MEM.ADDR2 DATA_MEM.ADDR3 DATA_MEM.ADDR4 DATA_MEM.ADDR5 DATA_MEM.ADDR6 DATA_MEM.ADDR7 DATA_MEM.ADDR8 DATA_MEM.ADDR9 DATA_MEM.ADDR10 DATA_MEM.ADDR11 DATA_MEM.ADDR12 DATA_MEM.ADDR13 DATA_MEM.ADDR14 DATA_MEM.ADDR15 DATA_MEM.ADDR16 DATA_MEM.ADDR17 DATA_MEM.ADDR18
component class XTAL: C14 C15 XTAL
component class USB: J1 L1 L2 USB_D
component class U_psu_toggle_switch: PSU_H "PWR JUMPER" TSW
component class U_microcontroller_reset_button: RESET_SW
component class U_decoupling: C8 C9 C10 C20 C21 C22 C23 C24 C25 C26 C27 C28 C29 C30 C31 C32 C33 C34 C35 C36 C37 C38 C39 C40 C41 C42 C43 C44 C45 C46 C47 C48 C49 C50 C51 C52 C53 C54 C55 C56 C57 C58 C59 C60 C61 C62 C63 C64 C65 C66
component class SW: SW1 SW2 SW3 SW4 SW5 SW6 SW7 SW8
component class SERIAL_PORT: E1 E2 E3 E4 E5 SP_CON SP_H SPD
component class SD: R32 R33 R34 R35 R36 R37 R38 R39 SD1
component class SCU: C16 C17 C18 C19 SCU SCU_FPGA_H_A SCU_FPGA_H_B SCU_FPGA_H_C SCU_LED_H SCU_SD_H SCU_SW_H SCU_USB_H
component class PS: C4 C5 C6 C7 C11 C12 C13 E8 E9 E10 E11 LED2 LED4 PW PW_H2 PW_H4 R25 R29 R31 VR2 VR4
component class OSC: OSC
component class LEDS: LED5 LED6 LED7 LED8 LED9 LED10 LED11 LED12 LED13 LED14 LED15 LED16 LED17 LED18 LED19 LED20 R4 R5 R6 R7 R8 R9 R10 R11 R12 R13 R14 R15 R16 R17 R18 R19
component class LEDS_LOGO: LED21 LED22 R20 R21
component class IMEM1: MEM_IMEM1
component class IMEM0: "INSTRUCTION MEMORY 0" MEM_IMEM0
component class HEADERS: FPGA_H_A FPGA_H_B FPGA_H_C JTAG JTAG_H POWER_H SCU_H
component class FPGA: FPGA R1 R2 R3
component class DMEM: MEM_DMEM
net class FPGA.STATE[0..1]: FPGA.STATE0 FPGA.STATE1

## Components (designator, comment, footprint, x,y, rotation, side; value= is the part's Value field where it differs from the comment)
C4 "1210" CAPC1210(3225)105_L 92.46,131 r0 top
C5 "1210" CAPC1210(3225)105_L 100.46,134 r0 top
C6 "1210" CAPC1210(3225)105_L 92.46,121 r0 top
C7 "1210" CAPC1210(3225)105_L 100.46,127 r0 top
C8 "CAP 10pF 100V 1210(3225)" CAPC1210(3225)100_L 194,156 r180 bottom
C9 "CAP 10pF 100V 1210(3225)" CAPC1210(3225)100_L 194,162 r180 bottom
C10 "CAP 10pF 100V 1210(3225)" CAPC1210(3225)100_L 194,168 r180 bottom
C11 "1210" CAPC1210(3225)105_L 92.46,99 r0 top
C12 "1210" CAPC1210(3225)105_L 92.46,106 r0 top
C13 "1210" CAPC1210(3225)105_L 92.46,113 r0 top
C14 "Cap 1210 SMD" CAPC1210(3225)100_L 116,151 r90 top
C15 "Cap 1210 SMD" CAPC1210(3225)100_L 110,151 r270 top
C16 "CAP 1uF 100V 1210(3225)" CAPC1210(3225)100_L 118,179 r0 top
C17 "CAP 4.7uF 100V 1210(3225)" CAPC1210(3225)100_L 110,179 r0 top
C18 "CAP 1uF 100V 1210(3225)" CAPC1210(3225)100_L 102,179 r0 top
C19 "CAP 1uF 100V 1210(3225)" CAPC1210(3225)100_L 102,185 r0 top
C20 "CAP 100nF 100V 1210(3225)" CAPC1210(3225)100_L 194,174 r180 bottom
C21 "CAP 100nF 100V 1210(3225)" CAPC1210(3225)100_L 194,181 r180 bottom
C22 "CAP 100nF 100V 1210(3225)" CAPC1210(3225)100_L 187,178 r90 bottom
C23 "CAP 100nF 100V 1210(3225)" CAPC1210(3225)100_L 180,178 r90 bottom
C24 "CAP 100nF 100V 1210(3225)" CAPC1210(3225)100_L 174,178 r90 bottom
C25 "CAP 100nF 100V 1210(3225)" CAPC1210(3225)100_L 194,150 r180 bottom
C26 "CAP 100nF 100V 1210(3225)" CAPC1210(3225)100_L 168,178 r90 bottom
C27 "CAP 100nF 100V 1210(3225)" CAPC1210(3225)100_L 187,153 r270 bottom
C28 "CAP 100nF 100V 1210(3225)" CAPC1210(3225)100_L 181,153 r270 bottom
C29 "CAP 100nF 100V 1210(3225)" CAPC1210(3225)100_L 175,153 r270 bottom
C30 "CAP 100nF 100V 1210(3225)" CAPC1210(3225)100_L 169,153 r270 bottom
C31 "CAP 100nF 100V 1210(3225)" CAPC1210(3225)100_L 163,153 r270 bottom
C32 "CAP 100nF 100V 1210(3225)" CAPC1210(3225)100_L 170,159 r180 bottom
C33 "CAP 100nF 100V 1210(3225)" CAPC1210(3225)100_L 170,165 r180 bottom
C34 "CAP 100nF 100V 1210(3225)" CAPC1210(3225)100_L 201,141 r0 bottom
C35 "CAP 100nF 100V 1210(3225)" CAPC1210(3225)100_L 194,141 r0 bottom
C36 "CAP 100nF 100V 1210(3225)" CAPC1210(3225)100_L 187,141 r0 bottom
C37 "CAP 100nF 100V 1210(3225)" CAPC1210(3225)100_L 177,141 r0 bottom
C38 "CAP 100nF 100V 1210(3225)" CAPC1210(3225)100_L 170,141 r0 bottom
C39 "CAP 100nF 100V 1210(3225)" CAPC1210(3225)100_L 163,141 r0 bottom
C40 "CAP 100nF 100V 1210(3225)" CAPC1210(3225)100_L 153,141 r0 bottom
C41 "CAP 100nF 100V 1210(3225)" CAPC1210(3225)100_L 145,141 r0 bottom
C42 "CAP 100nF 100V 1210(3225)" CAPC1210(3225)100_L 138,141 r0 bottom
C43 "CAP 100nF 100V 1210(3225)" CAPC1210(3225)100_L 114,180 r180 bottom
C44 "CAP 100nF 100V 1210(3225)" CAPC1210(3225)100_L 106,180 r180 bottom
C45 "CAP 100nF 100V 1210(3225)" CAPC1210(3225)100_L 121,180 r180 bottom
C46 "CAP 100nF 100V 1210(3225)" CAPC1210(3225)100_L 124,186 r180 bottom
C47 "CAP 100nF 100V 1210(3225)" CAPC1210(3225)100_L 124,192 r180 bottom
C48 "CAP 100nF 100V 1210(3225)" CAPC1210(3225)100_L 124,198 r180 bottom
C49 "CAP 100nF 100V 1210(3225)" CAPC1210(3225)100_L 124,204 r180 bottom
C50 "CAP 100nF 100V 1210(3225)" CAPC1210(3225)100_L 124,210 r180 bottom
C51 "CAP 100nF 100V 1210(3225)" CAPC1210(3225)100_L 117,210 r180 bottom
C52 "CAP 100nF 100V 1210(3225)" CAPC1210(3225)100_L 117,204 r180 bottom
C53 "CAP 100nF 100V 1210(3225)" CAPC1210(3225)100_L 117,198 r180 bottom
C54 "CAP 100nF 100V 1210(3225)" CAPC1210(3225)100_L 110,198 r180 bottom
C55 "CAP 100nF 100V 1210(3225)" CAPC1210(3225)100_L 103,198 r180 bottom
C56 "CAP 100nF 100V 1210(3225)" CAPC1210(3225)100_L 103,192 r180 bottom
C57 "CAP 100nF 100V 1210(3225)" CAPC1210(3225)100_L 103,186 r180 bottom
C58 "CAP 100nF 100V 1210(3225)" CAPC1210(3225)100_L 170,171 r180 bottom
C59 "CAP 100nF 100V 1210(3225)" CAPC1210(3225)100_L 163,159 r180 bottom
C60 "CAP 100nF 100V 1210(3225)" CAPC1210(3225)100_L 163,165 r180 bottom
C61 "CAP 100nF 100V 1210(3225)" CAPC1210(3225)100_L 163,171 r180 bottom
C62 "CAP 100nF 100V 1210(3225)" CAPC1210(3225)100_L 160,177 r180 bottom
C63 "CAP 100nF 100V 1210(3225)" CAPC1210(3225)100_L 155,171 r180 bottom
C64 "CAP 100nF 100V 1210(3225)" CAPC1210(3225)100_L 155,165 r180 bottom
C65 "CAP 100nF 100V 1210(3225)" CAPC1210(3225)100_L 155,159 r180 bottom
C66 "CAP 100nF 100V 1210(3225)" CAPC1210(3225)100_L 155,153 r180 bottom
E1 "100nF" cap_pol_size_B 82,172.4 r0 top
E2 "100nF" cap_pol_size_B 72.975,154.4 r0 top
E3 "100nF" cap_pol_size_B 72.975,163.4 r0 top
E4 "100nF" cap_pol_size_B 72.975,172.4 r0 top
E5 "100nF" cap_pol_size_B 82,181.25 r0 top
E8 "10uF" cap_pol_size_B 83.46,132 r0 top
E9 "10uF" cap_pol_size_B 83.46,121 r0 top
E10 "10uF" cap_pol_size_B 83.46,111 r0 top
E11 "10uF" cap_pol_size_B 83.46,100 r0 top
FPGA "XC6SLX45-2CSG324I" CSG324 183.3,165.85 r0 top
FPGA_H_A "Header 20X2" HDR2X20 93,236 r0 top
FPGA_H_B "Header 20X2" HDR2X20 93,228 r0 top
FPGA_H_C "Header 2X2" HDR2X2 126,220 r0 top
J1 "USB Micro Type B" USB_Micro-B_FCI_SMD 52.6,194 r270 top
JTAG_H "Header 2X2" HDR2X2 120,220 r0 top
L1 "160 Ohm" "WE-CNSW, 1206" 73,185.25 r0 top
L2 "300 Ohm" "SMD 0603" 73,191.25 r0 top
LED2 "HSMC-C190" 1.6X0.8X0.8 58,119 r0 top
LED4 "HSMC-C190" 1.6X0.8X0.8 58,98 r0 top
LED5 "HSMG-C170" 2.0X1.25X0.8 108.1,113.6 r270 top
LED6 "HSMG-C170" 2.0X1.25X0.8 114.1,113.6 r270 top
LED7 "HSMG-C170" 2.0X1.25X0.8 120.1,113.6 r270 top
LED8 "HSMG-C170" 2.0X1.25X0.8 126.1,113.6 r270 top
LED9 "HSMG-C170" 2.0X1.25X0.8 132.1,113.6 r270 top
LED10 "HSMG-C170" 2.0X1.25X0.8 138.1,113.6 r270 top
LED11 "HSMG-C170" 2.0X1.25X0.8 144.1,113.6 r270 top
LED12 "HSMG-C170" 2.0X1.25X0.8 150.1,113.6 r270 top
LED13 "HSMG-C170" 2.0X1.25X0.8 156.1,113.6 r270 top
LED14 "HSMG-C170" 2.0X1.25X0.8 162.1,113.6 r270 top
LED15 "HSMG-C170" 2.0X1.25X0.8 168.1,113.6 r270 top
LED16 "HSMG-C170" 2.0X1.25X0.8 174.1,113.6 r270 top
LED17 "HSMG-C170" 2.0X1.25X0.8 180.1,113.6 r270 top
LED18 "HSMG-C170" 2.0X1.25X0.8 186.1,113.6 r270 top
LED19 "HSMG-C170" 2.0X1.25X0.8 192.1,113.6 r270 top
LED20 "HSMG-C170" 2.0X1.25X0.8 198.1,113.6 r270 top
LED21 "HSMC-C190" 1.6X0.8X0.8 162.8,199.9 r180 top
LED22 "HSMC-C190" 1.6X0.8X0.8 151.6,199.8 r180 top
MEM_DMEM "memchip-AS7C38098A" AS7C38098A-10TIN 193.6,141.3 r90 top (schematic designator MEM)
MEM_IMEM0 "memchip-AS7C38098A" AS7C38098A-10TIN 145.6,141.3 r90 top (schematic designator MEM)
MEM_IMEM1 "memchip-AS7C38098A" AS7C38098A-10TIN 169.6,141.3 r90 top (schematic designator MEM)
OSC "Oscillator TXC 7W" "TXC - 7W-60.000MBB-T" 128.6,141.2 r180 top
POWER_H "Header 6X2" HDR2X6 104,220 r0 top
PSU_H "Header 2X2" HDR2X2 103,142.5 r90 top
PW "DC-10B" KLD-0202 52.7,142 r0 top
PW_H2 "Header 2" HDR1X2 57.46,125 r0 top
PW_H4 "Header 2" HDR1X2 57.46,104 r0 top
R1 "330R 5% 1206(3216)" RESC1206(3216)_M 202,173 r270 top
R2 "330R 5% 1206(3216)" RESC1206(3216)_M 202,165 r90 top
R3 "330R 5% 1206(3216)" RESC1206(3216)_M 202,157 r90 top
R4 "56R 5% 1206(3216)" RESC1206(3216)_N 111,120.9 r90 top
R5 "56R 5% 1206(3216)" RESC1206(3216)_N 117,120.9 r90 top
R6 "56R 5% 1206(3216)" RESC1206(3216)_N 123,120.9 r90 top
R7 "56R 5% 1206(3216)" RESC1206(3216)_N 129,120.9 r90 top
R8 "56R 5% 1206(3216)" RESC1206(3216)_N 135,120.9 r90 top
R9 "56R 5% 1206(3216)" RESC1206(3216)_N 141,120.9 r90 top
R10 "56R 5% 1206(3216)" RESC1206(3216)_N 147,120.9 r90 top
R11 "56R 5% 1206(3216)" RESC1206(3216)_N 153,120.9 r90 top
R12 "56R 5% 1206(3216)" RESC1206(3216)_N 159,120.9 r90 top
R13 "56R 5% 1206(3216)" RESC1206(3216)_N 165,120.9 r90 top
R14 "56R 5% 1206(3216)" RESC1206(3216)_N 171,120.9 r90 top
R15 "56R 5% 1206(3216)" RESC1206(3216)_N 177,120.9 r90 top
R16 "56R 5% 1206(3216)" RESC1206(3216)_N 183,120.9 r90 top
R17 "56R 5% 1206(3216)" RESC1206(3216)_N 189,120.9 r90 top
R18 "56R 5% 1206(3216)" RESC1206(3216)_N 195,120.9 r90 top
R19 "56R 5% 1206(3216)" RESC1206(3216)_N 201,120.9 r90 top
R20 "Res 1206 for logo" RESC1206(3216)_L 139.9,215.4 r180 top
R21 "Res 1206 for logo" RESC1206(3216)_L 139.9,220.6 r0 top
R25 "Res 1206" RESC1206(3216)_L 100.46,120 r180 top
R29 "Res 1210" RESC1210(3225)_M 101.46,111 r0 top
R31 "Res 1210" RESC1210(3225)_M 101.46,99 r0 top
R32 "Res 1206 for SD" RESC1206(3216)_M 85.73,214.381 r180 top
R33 "Res 1206 for SD" RESC1206(3216)_M 85.73,208.381 r180 top
R34 "Res 1206 for SD" RESC1206(3216)_M 85.73,202.381 r180 top
R35 "Res 1206 for SD" RESC1206(3216)_M 85.73,196.381 r180 top
R36 "Res 1206 for SD" RESC1206(3216)_M 85.73,238.381 r180 top
R37 "Res 1206 for SD" RESC1206(3216)_M 85.73,226.381 r180 top
R38 "Res 1206 for SD" RESC1206(3216)_M 85.73,232.381 r180 top
R39 "Res 1206 for SD" RESC1206(3216)_L 85.73,220.381 r180 top
RESET_SW "FSM2JSMA" Button 107.5,161 r0 top
SCU "EFM32GG390F1024-BGA112" ENMR-BGA112 114,191 r0 top
SCU_FPGA_H_A "Header 20X2" HDR2X20 135,153 r90 top
SCU_FPGA_H_B "Header 20X2" HDR2X20 141,153 r90 top
SCU_FPGA_H_C "Header 2" HDR1X2 147,153 r180 top
SCU_H "Header 4X2" HDR2X4 93,220 r0 top
SCU_LED_H "Header 16X2" HDR2X16 107.2,127.3 r0 top
SCU_SD_H "Header 4X2" HDR2X4 96,200.7 r90 top
SCU_SW_H "Header 8X2" HDR2X8 148.8,127.3 r0 top
SCU_USB_H "Header 4X2" HDR2X4 96,188 r90 top
SD1 "sd" "EDGE CONNECTOR - DUPLICATE1" 73.73,235.381 r270 top
SP_CON "D Connector 9" DSUB1.385-2H9 52.7,168.4 r90 top
SP_H "Header 8X2" HDR2X8 96,165.2 r90 top
SPD "MAX3232CDBE4" TI-DB16_L 81.75,158.5 r270 top
SW1 "FSM2JSMA" Button 113.5,106.6 r180 top
SW2 "FSM2JSMA" Button 125.5,106.6 r180 top
SW3 "FSM2JSMA" Button 137.5,106.6 r180 top
SW4 "FSM2JSMA" Button 149.5,106.6 r180 top
SW5 "FSM2JSMA" Button 161.5,106.6 r180 top
SW6 "FSM2JSMA" Button 173.5,106.6 r180 top
SW7 "FSM2JSMA" Button 185.5,106.6 r180 top
SW8 "FSM2JSMA" Button 197.5,106.6 r180 top
TSW "G3T13AP" G3T13AP 85,142.65 r0 top
USB_D "#NAME?" SOT23_5L 73,197.75 r0 top
VR2 "LM1084IT-3.3" T03B 71.46,125 r180 top
VR4 "LM1084IT-ADJ" T03B 71.46,104 r180 top
XTAL "Crystal ABS10-32.768kHz" crystal-ABS10-32.768KHZ-T 113,143 r0 top

## Footprints (in the part's own frame and the unit in brackets; to place one, negate y for a bottom-side part, rotate by r counter-clockwise, add the part's x,y. Pads: shape width x height; smd on the part's side, far side on the other; paste and mask are expansions set on the pad)
1.6X0.8X0.8 [mm] "SM LED; 2 Flat Leads"
  rect 0.8x0.8 smd: 1(-0.75,0) 2(0.75,0)
  silkscreen extent -1.55,-0.8 1.85,0.8
2.0X1.25X0.8 [mm] "SM LED; 2 Flat Leads"
  rect 1.3x1.3 smd: 1(-1.2,0) 2(1.2,0)
  silkscreen extent -2.25,-1.05 2.55,1.05
AS7C38098A-10TIN [mm] "TSOPII, 44-Leads, Body 18,41x10,16mm, Pitch 0,80mm, IPC Medium Density"
  oval 1.6x0.55 smd: 1(-5.6,8.4) 2(-5.6,7.6) 3(-5.6,6.8) 4(-5.6,6) 5(-5.6,5.2) 6(-5.6,4.4) 7(-5.6,3.6) 8(-5.6,2.8) 9(-5.6,2) 10(-5.6,1.2) 11(-5.6,0.4) 12(-5.6,-0.4) 13(-5.6,-1.2) 14(-5.6,-2) 15(-5.6,-2.8) 16(-5.6,-3.6) 17(-5.6,-4.4) 18(-5.6,-5.2) 19(-5.6,-6) 20(-5.6,-6.8) 21(-5.6,-7.6) 22(-5.6,-8.4) 23(5.6,-8.4) 24(5.6,-7.6) 25(5.6,-6.8) 26(5.6,-6) 27(5.6,-5.2) 28(5.6,-4.4) 29(5.6,-3.6) 30(5.6,-2.8) 31(5.6,-2) 32(5.6,-1.2) 33(5.6,-0.4) 34(5.6,0.4) 35(5.6,1.2) 36(5.6,2) 37(5.6,2.8) 38(5.6,3.6) 39(5.6,4.4) 40(5.6,5.2) 41(5.6,6) 42(5.6,6.8) 43(5.6,7.6) 44(5.6,8.4)
  silkscreen extent -5.72,-9.3 4.4,9.35, body extent -5.2,-9.3 5.2,9.3, height 1.2
Button [mm] "copied from 256 SoG"
  rect 1.4x2.1 smd: 1(0,9.1) 2(0,0) 3(4.5,9.1) 4(4.5,0)
  silkscreen extent -0.7,1.55 5.21,7.62
cap_pol_size_B [mm] "panasonic seris s type v size B ex. EEE1CA100AR"
  rect 0.7x1.8 smd: 1(0,-1.4) 2(0,1.4)
  silkscreen extent -2.16,-2.03 2.16,2.03
CAPC1210(3225)100_L [mm] "Chip Capacitor, Body 3.2x2.5mm, Height 1mm, IPC High Density"
  rect 0.95x2.6 smd: 1(-1.4,0) 2(1.4,0)
  silkscreen extent -0.55,-1.2 0.55,1.2, body extent -1.7,-1.35 1.7,1.35, height 1
CAPC1210(3225)105_L [mm] "Chip Capacitor, Body 3.2x2.5mm, Height 1.05mm, IPC High Density"
  rect 1.2x2.6 smd: 1(-1.275,0) 2(1.275,0)
  silkscreen extent -0.3,-1.2 0.3,1.2, body extent -1.7,-1.35 1.7,1.35, height 1.05
crystal-ABS10-32.768KHZ-T [mm]
  rect 1.3x2.2 smd: 1(-1.9,0) 2(1.9,0)
  silkscreen extent -2.8,-1.4 2.9,1.4
CSG324 [mm] "BGA, 324-Leads, Body 15x15mm, Pitch 0.8mm"
  round 0.36 smd: A1(-6.8,6.8) A2(-6,6.8) A3(-5.2,6.8) A4(-4.4,6.8) A5(-3.6,6.8) A6(-2.8,6.8) A7(-2,6.8) A8(-1.2,6.8) A9(-0.4,6.8) A10(0.4,6.8) A11(1.2,6.8) A12(2,6.8) A13(2.8,6.8) A14(3.6,6.8) A15(4.4,6.8) A16(5.2,6.8) A17(6,6.8) A18(6.8,6.8) B1(-6.8,6) B2(-6,6) B3(-5.2,6) B4(-4.4,6) B5(-3.6,6) B6(-2.8,6) B7(-2,6) B8(-1.2,6) B9(-0.4,6) B10(0.4,6) B11(1.2,6) B12(2,6) B13(2.8,6) B14(3.6,6) B15(4.4,6) B16(5.2,6) B17(6,6) B18(6.8,6) C1(-6.8,5.2) C2(-6,5.2) C3(-5.2,5.2) C4(-4.4,5.2) C5(-3.6,5.2) C6(-2.8,5.2) C7(-2,5.2) C8(-1.2,5.2) C9(-0.4,5.2) C10(0.4,5.2) C11(1.2,5.2) C12(2,5.2) C13(2.8,5.2) C14(3.6,5.2) C15(4.4,5.2) C16(5.2,5.2) C17(6,5.2) C18(6.8,5.2) D1(-6.8,4.4) D2(-6,4.4) D3(-5.2,4.4) D4(-4.4,4.4) D5(-3.6,4.4) D6(-2.8,4.4) D7(-2,4.4) D8(-1.2,4.4) D9(-0.4,4.4) D10(0.4,4.4) D11(1.2,4.4) D12(2,4.4) D13(2.8,4.4) D14(3.6,4.4) D15(4.4,4.4) D16(5.2,4.4) D17(6,4.4) D18(6.8,4.4) E1(-6.8,3.6) E2(-6,3.6) E3(-5.2,3.6) E4(-4.4,3.6) E5(-3.6,3.6) E6(-2.8,3.6) E7(-2,3.6) E8(-1.2,3.6) E9(-0.4,3.6) E10(0.4,3.6) E11(1.2,3.6) E12(2,3.6) E13(2.8,3.6) E14(3.6,3.6) E15(4.4,3.6) E16(5.2,3.6) E17(6,3.6) E18(6.8,3.6) F1(-6.8,2.8) F2(-6,2.8) F3(-5.2,2.8) F4(-4.4,2.8) F5(-3.6,2.8) F6(-2.8,2.8) F7(-2,2.8) F8(-1.2,2.8) F9(-0.4,2.8) F10(0.4,2.8) F11(1.2,2.8) F12(2,2.8) F13(2.8,2.8) F14(3.6,2.8) F15(4.4,2.8) F16(5.2,2.8) F17(6,2.8) F18(6.8,2.8) G1(-6.8,2) G2(-6,2) G3(-5.2,2) G4(-4.4,2) G5(-3.6,2) G6(-2.8,2) G7(-2,2) G8(-1.2,2) G9(-0.4,2) G10(0.4,2) G11(1.2,2) G12(2,2) G13(2.8,2) G14(3.6,2) G15(4.4,2) G16(5.2,2) G17(6,2) G18(6.8,2) H1(-6.8,1.2) H2(-6,1.2) H3(-5.2,1.2) H4(-4.4,1.2) H5(-3.6,1.2) H6(-2.8,1.2) H7(-2,1.2) H8(-1.2,1.2) H9(-0.4,1.2) H10(0.4,1.2) H11(1.2,1.2) H12(2,1.2) H13(2.8,1.2) H14(3.6,1.2) H15(4.4,1.2) H16(5.2,1.2) H17(6,1.2) H18(6.8,1.2) J1(-6.8,0.4) J2(-6,0.4) J3(-5.2,0.4) J4(-4.4,0.4) J5(-3.6,0.4) J6(-2.8,0.4) J7(-2,0.4) J8(-1.2,0.4) J9(-0.4,0.4) J10(0.4,0.4) J11(1.2,0.4) J12(2,0.4) J13(2.8,0.4) J14(3.6,0.4) J15(4.4,0.4) J16(5.2,0.4) J17(6,0.4) J18(6.8,0.4) K1(-6.8,-0.4) K2(-6,-0.4) K3(-5.2,-0.4) K4(-4.4,-0.4) K5(-3.6,-0.4) K6(-2.8,-0.4) K7(-2,-0.4) K8(-1.2,-0.4) K9(-0.4,-0.4) K10(0.4,-0.4) K11(1.2,-0.4) K12(2,-0.4) K13(2.8,-0.4) K14(3.6,-0.4) K15(4.4,-0.4) K16(5.2,-0.4) K17(6,-0.4) K18(6.8,-0.4) L1(-6.8,-1.2) L2(-6,-1.2) L3(-5.2,-1.2) L4(-4.4,-1.2) L5(-3.6,-1.2) L6(-2.8,-1.2) L7(-2,-1.2) L8(-1.2,-1.2) L9(-0.4,-1.2) L10(0.4,-1.2) L11(1.2,-1.2) L12(2,-1.2) L13(2.8,-1.2) L14(3.6,-1.2) L15(4.4,-1.2) L16(5.2,-1.2) L17(6,-1.2) L18(6.8,-1.2) M1(-6.8,-2) M2(-6,-2) M3(-5.2,-2) M4(-4.4,-2) M5(-3.6,-2) M6(-2.8,-2) M7(-2,-2) M8(-1.2,-2) M9(-0.4,-2) M10(0.4,-2) M11(1.2,-2) M12(2,-2) M13(2.8,-2) M14(3.6,-2) M15(4.4,-2) M16(5.2,-2) M17(6,-2) M18(6.8,-2) N1(-6.8,-2.8) N2(-6,-2.8) N3(-5.2,-2.8) N4(-4.4,-2.8) N5(-3.6,-2.8) N6(-2.8,-2.8) N7(-2,-2.8) N8(-1.2,-2.8) N9(-0.4,-2.8) N10(0.4,-2.8) N11(1.2,-2.8) N12(2,-2.8) N13(2.8,-2.8) N14(3.6,-2.8) N15(4.4,-2.8) N16(5.2,-2.8) N17(6,-2.8) N18(6.8,-2.8) P1(-6.8,-3.6) P2(-6,-3.6) P3(-5.2,-3.6) P4(-4.4,-3.6) P5(-3.6,-3.6) P6(-2.8,-3.6) P7(-2,-3.6) P8(-1.2,-3.6) P9(-0.4,-3.6) P10(0.4,-3.6) P11(1.2,-3.6) P12(2,-3.6) P13(2.8,-3.6) P14(3.6,-3.6) P15(4.4,-3.6) P16(5.2,-3.6) P17(6,-3.6) P18(6.8,-3.6) R1(-6.8,-4.4) R2(-6,-4.4) R3(-5.2,-4.4) R4(-4.4,-4.4) R5(-3.6,-4.4) R6(-2.8,-4.4) R7(-2,-4.4) R8(-1.2,-4.4) R9(-0.4,-4.4) R10(0.4,-4.4) R11(1.2,-4.4) R12(2,-4.4) R13(2.8,-4.4) R14(3.6,-4.4) R15(4.4,-4.4) R16(5.2,-4.4) R17(6,-4.4) R18(6.8,-4.4) T1(-6.8,-5.2) T2(-6,-5.2) T3(-5.2,-5.2) T4(-4.4,-5.2) T5(-3.6,-5.2) T6(-2.8,-5.2) T7(-2,-5.2) T8(-1.2,-5.2) T9(-0.4,-5.2) T10(0.4,-5.2) T11(1.2,-5.2) T12(2,-5.2) T13(2.8,-5.2) T14(3.6,-5.2) T15(4.4,-5.2) T16(5.2,-5.2) T17(6,-5.2) T18(6.8,-5.2) U1(-6.8,-6) U2(-6,-6) U3(-5.2,-6) U4(-4.4,-6) U5(-3.6,-6) U6(-2.8,-6) U7(-2,-6) U8(-1.2,-6) U9(-0.4,-6) U10(0.4,-6) U11(1.2,-6) U12(2,-6) U13(2.8,-6) U14(3.6,-6) U15(4.4,-6) U16(5.2,-6) U17(6,-6) U18(6.8,-6) V1(-6.8,-6.8) V2(-6,-6.8) V3(-5.2,-6.8) V4(-4.4,-6.8) V5(-3.6,-6.8) V6(-2.8,-6.8) V7(-2,-6.8) V8(-1.2,-6.8) V9(-0.4,-6.8) V10(0.4,-6.8) V11(1.2,-6.8) V12(2,-6.8) V13(2.8,-6.8) V14(3.6,-6.8) V15(4.4,-6.8) V16(5.2,-6.8) V17(6,-6.8) V18(6.8,-6.8)
  silkscreen extent -8.27,-7.5 7.5,7.5, body extent -7.5,-7.5 7.5,7.5, height 1.5
DSUB1.385-2H9 [mm] "Connector; D Subminiature; 9 Position; Right Angle; Pitch 1.385 mm"
  rect 1.69x1.69 hole 1.09: 1(-5.54,-10.92)
  round 1.69 hole 1.09: 2(-2.77,-10.92) 3(0,-10.92) 4(2.77,-10.92) 5(5.54,-10.92) 6(-4.155,-8.08) 7(-1.385,-8.08) 8(1.385,-8.08) 9(4.155,-8.08)
  round 4.76 hole 3.26: 10(-12.495,-9.5) 11(12.495,-9.5)
  silkscreen extent -15.4,-12.4 15.4,6
"EDGE CONNECTOR - DUPLICATE1" [mm]
  rect 1.26x2.5 smd: 1(21.082,1.27) 2(18.542,1.27) 3(16.002,1.27) 4(13.462,1.27) 5(10.922,1.27) 6(8.382,1.27) 7(5.842,1.27) 8(4.191,1.27) 9(23.622,1.27) 10(0.381,1.27) 11(2.286,1.27) 12(25.273,1.27)
  rect 1x2.5 smd: 13(26.67,1.27)
  silkscreen extent -0.63,-17.02 27.43,-0.25
ENMR-BGA112 [mm] "BGA, 112-Balls, Body 10x10mm, Pitch 0.8mm"
  round 0.35 smd: A1(-4,4) A2(-3.2,4) A3(-2.4,4) A4(-1.6,4) A5(-0.8,4) A6(0,4) A7(0.8,4) A8(1.6,4) A9(2.4,4) A10(3.2,4) A11(4,4) B1(-4,3.2) B2(-3.2,3.2) B3(-2.4,3.2) B4(-1.6,3.2) B5(-0.8,3.2) B6(0,3.2) B7(0.8,3.2) B8(1.6,3.2) B9(2.4,3.2) B10(3.2,3.2) B11(4,3.2) C1(-4,2.4) C2(-3.2,2.4) C3(-2.4,2.4) C4(-1.6,2.4) C5(-0.8,2.4) C6(0,2.4) C7(0.8,2.4) C8(1.6,2.4) C9(2.4,2.4) C10(3.2,2.4) C11(4,2.4) D1(-4,1.6) D2(-3.2,1.6) D3(-2.4,1.6) D4(-1.6,1.6) D5(-0.8,1.6) D6(0,1.6) D7(0.8,1.6) D8(1.6,1.6) D9(2.4,1.6) D10(3.2,1.6) D11(4,1.6) E1(-4,0.8) E2(-3.2,0.8) E3(-2.4,0.8) E4(-1.6,0.8) E5(-0.8,0.8) E6(0,0.8) E7(0.8,0.8) E8(1.6,0.8) E9(2.4,0.8) E10(3.2,0.8) E11(4,0.8) F1(-4,0) F2(-3.2,0) F3(-2.4,0) F4(-1.6,0) F5(-0.8,0) F6(0,0) F7(0.8,0) F8(1.6,0) F9(2.4,0) F10(3.2,0) F11(4,0) G1(-4,-0.8) G2(-3.2,-0.8) G3(-2.4,-0.8) G4(-1.6,-0.8) G5(-0.8,-0.8) G6(0,-0.8) G7(0.8,-0.8) G8(1.6,-0.8) G9(2.4,-0.8) G10(3.2,-0.8) G11(4,-0.8) H1(-4,-1.6) H2(-3.2,-1.6) H3(-2.4,-1.6) H4(-1.6,-1.6) H5(-0.8,-1.6) H6(0,-1.6) H7(0.8,-1.6) H8(1.6,-1.6) H9(2.4,-1.6) H10(3.2,-1.6) H11(4,-1.6) J1(-4,-2.4) J2(-3.2,-2.4) J3(-2.4,-2.4) J4(-1.6,-2.4) J5(-0.8,-2.4) J6(0,-2.4) J7(0.8,-2.4) J8(1.6,-2.4) J9(2.4,-2.4) J10(3.2,-2.4) J11(4,-2.4) K1(-4,-3.2) K2(-3.2,-3.2) K3(-2.4,-3.2) K4(-1.6,-3.2) K5(-0.8,-3.2) K6(0,-3.2) K7(0.8,-3.2) K8(1.6,-3.2) K9(2.4,-3.2) K10(3.2,-3.2) K11(4,-3.2) L1(-4,-4) L2(-3.2,-4) L3(-2.4,-4) L4(-1.6,-4) L5(-0.8,-4) L6(0,-4) L7(0.8,-4) L8(1.6,-4) L9(2.4,-4) L10(3.2,-4) L11(4,-4)
  silkscreen extent -5.77,-5 5,5, body extent -5,-5 5,5, height 1.3
G3T13AP [mm]
  rect 2x1 smd: 4(-3,1.905) 5(-3,-0.635) 6(-3,-3.175)
  rect 2.2x1.2 smd: ""(3,-1.9) ""(3,2.605)
  silkscreen extent -4.5,-4.5 5,4
HDR1X2 [mm] "Connector; Header; 2 Position"
  rect 1.5x1.5 hole 0.9: 1(0,0)
  round 1.5 hole 0.9: 2(2.54,0)
  silkscreen extent -1.27,-1.27 3.81,1.27
HDR2X2 [mm] "Connector; Header; 2x2 Position"
  rect 1.5x1.5 hole 0.9: 1(0,0)
  round 1.5 hole 0.9: 2(0,2.54) 3(2.54,0) 4(2.54,2.54)
  silkscreen extent -1.27,-1.27 3.81,3.81
HDR2X4 [mm] "Connector; Header; 4x2 Position"
  rect 1.5x1.5 hole 0.9: 1(0,0)
  round 1.5 hole 0.9: 2(0,2.54) 3(2.54,0) 4(2.54,2.54) 5(5.08,0) 6(5.08,2.54) 7(7.62,0) 8(7.62,2.54)
  silkscreen extent -1.27,-1.27 8.89,3.81
HDR2X6 [mm] "Connector; Header; 6x2 Position"
  rect 1.5x1.5 hole 0.9: 1(0,0)
  round 1.5 hole 0.9: 2(0,2.54) 3(2.54,0) 4(2.54,2.54) 5(5.08,0) 6(5.08,2.54) 7(7.62,0) 8(7.62,2.54) 9(10.16,0) 10(10.16,2.54) 11(12.7,0) 12(12.7,2.54)
  silkscreen extent -1.27,-1.27 13.97,3.81
HDR2X8 [mm] "Connector; Header; 8x2 Position"
  rect 1.5x1.5 hole 0.9: 1(0,0)
  round 1.5 hole 0.9: 2(0,2.54) 3(2.54,0) 4(2.54,2.54) 5(5.08,0) 6(5.08,2.54) 7(7.62,0) 8(7.62,2.54) 9(10.16,0) 10(10.16,2.54) 11(12.7,0) 12(12.7,2.54) 13(15.24,0) 14(15.24,2.54) 15(17.78,0) 16(17.78,2.54)
  silkscreen extent -1.27,-1.27 19.05,3.81
HDR2X16 [mm] "Connector; Header; 16x2 Position"
  rect 1.5x1.5 hole 0.9: 1(0,0)
  round 1.5 hole 0.9: 2(0,2.54) 3(2.54,0) 4(2.54,2.54) 5(5.08,0) 6(5.08,2.54) 7(7.62,0) 8(7.62,2.54) 9(10.16,0) 10(10.16,2.54) 11(12.7,0) 12(12.7,2.54) 13(15.24,0) 14(15.24,2.54) 15(17.78,0) 16(17.78,2.54) 17(20.32,0) 18(20.32,2.54) 19(22.86,0) 20(22.86,2.54) 21(25.4,0) 22(25.4,2.54) 23(27.94,0) 24(27.94,2.54) 25(30.48,0) 26(30.48,2.54) 27(33.02,0) 28(33.02,2.54) 29(35.56,0) 30(35.56,2.54) 31(38.1,0) 32(38.1,2.54)
  silkscreen extent -1.27,-1.27 39.37,3.81
HDR2X20 [mm] "Connector; Header; 20x2 Position"
  rect 1.5x1.5 hole 0.9: 1(0,0)
  round 1.5 hole 0.9: 2(0,2.54) 3(2.54,0) 4(2.54,2.54) 5(5.08,0) 6(5.08,2.54) 7(7.62,0) 8(7.62,2.54) 9(10.16,0) 10(10.16,2.54) 11(12.7,0) 12(12.7,2.54) 13(15.24,0) 14(15.24,2.54) 15(17.78,0) 16(17.78,2.54) 17(20.32,0) 18(20.32,2.54) 19(22.86,0) 20(22.86,2.54) 21(25.4,0) 22(25.4,2.54) 23(27.94,0) 24(27.94,2.54) 25(30.48,0) 26(30.48,2.54) 27(33.02,0) 28(33.02,2.54) 29(35.56,0) 30(35.56,2.54) 31(38.1,0) 32(38.1,2.54) 33(40.64,0) 34(40.64,2.54) 35(43.18,0) 36(43.18,2.54) 37(45.72,0) 38(45.72,2.54) 39(48.26,0) 40(48.26,2.54)
  silkscreen extent -1.27,-1.27 49.53,3.81
KLD-0202 [mm] "DC Power Jack, 2.5mm, KLD Series, PCB Mount"
  oval 2x4.5 all layers, no hole: 1(13.7,0)
  round 1.5 hole 1: 1A(13.7,-1.25) 1B(13.7,1.25) 2A(7.5,-1) 2B(7.5,1) 3A(9.5,-5) 3B(11.5,-5)
  oval 2x4 all layers, no hole: 2(7.5,0)
  oval 4x2 all layers, no hole: 3(10.5,-5)
  silkscreen extent 0,-4.5 14.6,4.5
RESC1206(3216)_L [mm] "Chip Resistor, Body 3.2x1.6mm, IPC High Density"
  rect 0.95x1.7 smd: 1(-1.35,0) 2(1.35,0)
  silkscreen extent -0.5,-0.75 0.5,0.75, body extent -1.67,-0.87 1.67,0.87, height 0.75
RESC1206(3216)_M [mm] "Chip Resistor, Body 3.2x1.6mm, IPC Low Density"
  rect 1.35x1.9 smd: 1(-1.55,0) 2(1.55,0)
  silkscreen extent -0.5,-0.85 0.5,0.85, body extent -1.67,-0.87 1.67,0.87, height 0.75
RESC1206(3216)_N [mm] "Chip Resistor, Body 3.2x1.6mm, IPC Medium Density"
  rect 1.15x1.8 smd: 1(-1.45,0) 2(1.45,0)
  silkscreen extent -0.5,-0.8 0.5,0.8, body extent -1.67,-0.87 1.67,0.87, height 0.75
RESC1210(3225)_M [mm] "Chip Resistor, Body 3.2x2.5mm, IPC Low Density"
  rect 1.35x2.8 smd: 1(-1.6,0) 2(1.6,0)
  silkscreen extent -0.55,-1.3 0.55,1.3, body extent -1.7,-1.35 1.7,1.35, height 0.71
"SMD 0603" [mm] "Chip Inductor, 2-Leads, Body 1,6x0,8mm"
  rect 0.85x0.7 smd: 1(-0.775,0) 2(0.775,0)
  body extent -0.8,-0.4 0.8,0.4, height 0.79
SOT23_5L [mil] "SOT23_5L, 5-Leads, Body 3.60x2.9mm, Pitch 0.95mm"
  rect 44x24 smd: 1(-49.21,37.4) 2(-49.21,0) 3(-49.21,-37.4) 4(49.21,-37.4) 5(49.21,37.4)
  silkscreen extent -109,-65 86,65, body extent -55,-57 55,57, height 44
T03B [mm] "TO, Thru-Hole, Vertical, Heatsink Mounted; 3 In-Line Leads; Pitch 2.54 mm"
  rect 1.6x1.6 hole 1: 1(-2.54,0)
  round 1.6 hole 1: 2(0,0) 3(2.54,0)
  silkscreen extent -5.35,-1.85 5.35,2.85, body extent -5.4,-1.9 5.4,2.9, height 19.4
TI-DB16_L [mm] "SOP, 16-Leads, Body 6.2x5.3mm, Pitch 0.65mm, IPC High Density"
  oval 1.8x0.45 smd: 1(-3.4,2.275) 2(-3.4,1.625) 3(-3.4,0.975) 4(-3.4,0.325) 5(-3.4,-0.325) 6(-3.4,-0.975) 7(-3.4,-1.625) 8(-3.4,-2.275) 9(3.4,-2.275) 10(3.4,-1.625) 11(3.4,-0.975) 12(3.4,-0.325) 13(3.4,0.325) 14(3.4,0.975) 15(3.4,1.625) 16(3.4,2.275)
  silkscreen extent -3.52,-3.25 2.1,3.25, body extent -2.8,-3.25 2.8,3.25, height 2
"TXC - 7W-60.000MBB-T" [mm]
  rect 1x1 smd: 1(-3,-2.7)
  oct 1.8x2 smd: 1(-2.6,-2.2)
  rect 1.8x2 smd: 2(2.6,-2.2) 3(2.6,2.2) 4(-2.6,2.2)
  silkscreen extent -3.9,-3.6 3.5,3.3
USB_Micro-B_FCI_SMD [mm]
  round 0.508 on Mech14: 0(0,0)
  rrect20% 0.35x1.5 smd: 1(-1.3,5.6) 2(-0.65,5.6) 3(0,5.6) 4(0.65,5.6) 5(1.3,5.6)
  rrect50% 1.6x2.4 hole 1.5: SH(-5.1,5.3) SH(-5.1,1.6) SH(5.1,5.3) SH(5.1,1.6)
  rrect20% 1.2x1.5 smd: SH(-2.35,5.6) SH(2.35,5.6)
  Keep-Out Layer board cut-out: -3.9,0 -3.9,3.797 -3.839,4.103 -3.666,4.362 -3.406,4.536 -3.1,4.597 -3.1,4.597 3.1,4.597 3.406,4.536 3.666,4.362 3.839,4.103 3.9,3.797 3.9,3.797 3.9,0
  body extent -5.35,-21.58 5.35,5.8, height 4.67
"WE-CNSW, 1206" [mm] "SMD Inductor, 4-Leads, Body 1,8x3,4mm"
  rect 1.1x0.6 smd: 1(-1.35,0.5) 2(1.35,0.5) 3(1.35,-0.5) 4(-1.35,-0.5)
  body extent -1.6,-0.8 1.6,0.8, height 1.88

## Part data
C4 C5 C6 C7 C11 C12 C13: library part CMP-1038-01663-1, "CAP 100nF 100V ±5% 1210 (3225 Metric) Thickness 1.05mm SMD"
C8 C9 C10 C20 C21 C22 C23 C24 C25 C26 C27 C28 C29 C30 C31 C32 C33 C34 C35 C36 C37 C38 C39 C40 C41 C42 C43 C44 C45 C46 C47 C48 C49 C50 C51 C52 C53 C54 C55 C56 C57 C58 C59 C60 C61 C62 C63 C64 C65 C66: library part CMP-1038-00005-1, "CAP 100nF 100V ±0.25pF 1210 (3225 Metric) Thickness 1mm SMD"
C14 C15: library part CMP-1038-00186-1, "CAP 0.1uF 100V ±1% 1210 (3225 Metric) Thickness 1mm SMD"
C16 C18 C19: library part CMP-1038-00005-1, "CAP 1uF 100V ±0.25pF 1210 (3225 Metric) Thickness 1mm SMD"
C17: library part CMP-1038-00005-1, "CAP 4.7uF 100V ±0.25pF 1210 (3225 Metric) Thickness 1mm SMD"
E1 E2 E3 E4 E5 E8 E9 E10 E11: library part CAP_POL_SIZE_B, "size B series S type V capacitor, panasonic elec"
FPGA: "Spartan-6 LX 1.2V FPGA, 218 User I/Os, 324-Ball Chip-Scale BGA (0.8mm Pitch), Speed Grade 2, Industrial Grade, Pb-Free"
FPGA_H_A FPGA_H_B SCU_FPGA_H_A SCU_FPGA_H_B: "Header, 20-Pin, Dual row"
FPGA_H_C JTAG_H PSU_H: "Header, 2-Pin, Dual row"
J1: library part USB_Micro_TypeB_FCI, "Connector SMD-THD USB Micro Type B middle mount"
L1: library part "WE-CNSW 1206, 744232161", "SMD Common Mode Noise Suppressor WE-CNSW,  Z= 160 Ohm"
L2: library part "WE-CBF 0603, 742792641", "SMD EMI Suppression Ferrite Beads WE-CBF, Z= 300 Ohm"
LED2 LED4 LED21 LED22: "High Performance Chip LED, Red"
LED5 LED6 LED7 LED8 LED9 LED10 LED11 LED12 LED13 LED14 LED15 LED16 LED17 LED18 LED19 LED20: "Surface Mount Chip LED, Green"
POWER_H: "Header, 6-Pin, Dual row"
PW: library part PWR2.5, "Low Voltage Power Supply Connector"
PW_H2 PW_H4 SCU_FPGA_H_C: "Header, 2-Pin"
R1 R2 R3: library part CMP-1014-00062-1, "330R 0.25W 5% 1206 (3216 Metric)  SMD"
R4 R5 R6 R7 R8 R9 R10 R11 R12 R13 R14 R15 R16 R17 R18 R19: library part CMP-1014-00044-1, "56R 0.25W 5% 1206 (3216 Metric)  SMD"
R20 R21: library part CMP-1014-00056-1, "56R 0.25W 5% 1206 (3216 Metric)  SMD"
R25: library part CMP-1014-00056-1, "105R 0.25W 5% 1206 (3216 Metric)  SMD"
R29: library part CMP-1015-00405-1, "120R 0.5W 1% 1210 (3225 Metric)  SMD"
R31: library part CMP-1015-00405-1, "0R 0.5W 1% 1210 (3225 Metric)  SMD"
R32 R33 R34 R35 R36 R37 R38: library part CMP-1014-00702-1, "49K9 0.25W 1% 1206 (3216 Metric)  SMD"
R39: library part CMP-1014-00736-1, "100K 0.25W 1% 1206 (3216 Metric)  SMD"
RESET_SW SW1 SW2 SW3 SW4 SW5 SW6 SW7 SW8: library part switch-button
SCU: library part CMP-0270-00014-1, "EFM32 Giant Gecko, M3 ARM Cortex CPU, 1024 KB Flash, 128 KB RAM, 1.85 - 3.8 V Supply, 48 MHz Max Speed, -40 to 85 degC, 112-Pin BGA, RoHS Compliant"
SCU_H SCU_SD_H SCU_USB_H: "Header, 4-Pin, Dual row"
SCU_LED_H: "Header, 16-Pin, Dual row"
SCU_SW_H SP_H: "Header, 8-Pin, Dual row"
SP_CON: "Receptacle Assembly, 9 Position, Right Angle"
SPD: library part CMP-0299-01177-1, "3-V to 5.5-V Multichannel RS-232 Line Driver / Receiver with ±15-kV ESD Protection, 0 to 70 degC, 16-Pin SSOP (DB), Green (RoHS & no Sb/Br)"
USB_D: library part WE-TVS-HS,SOT23-5L,824011, "TVS Diode WE-TVS-HS, VRWM=5V"
VR2 VR4: "5A Low Dropout Positive Regulators, 3-pin TO-220"

## Free pads (board coordinates)
  round 2.4 hole 2: 0(53.775,244.15) 0(53.875,94.7) 0(203.15,94.7) 0(203.2,244.075)

## Via types
v1: diameter 0.4, hole 0.2, Top Layer to Bottom Layer, tented top, 896 vias
v2: diameter 0.4, hole 0.2, Top Layer to Bottom Layer, 14 vias
v3: diameter 0.6, hole 0.2, Top Layer to Bottom Layer, tented top, 1 vias

## Nets (pads, with @x,y where several pads share a name; then routed paths per layer and width w, separated by ;. In a path a pad name is that pad's centre, name@x,y a point inside that pad or via, vN(x,y) a via of type N, cw(c..) or ccw(c..) an arc to the next point about the centre after c; other vN are vias at no path point)
1.2V: C8.1 C9.1 C10.1 C12.2 C13.2 C20.1 C21.1 C22.1 C23.1 C24.1 C25.1 C26.1 E11.1 FPGA.G7 FPGA.H9 FPGA.H11 FPGA.J8 FPGA.J10 FPGA.K9 FPGA.K11 FPGA.L8 FPGA.L10 FPGA.M7 FPGA.M12 LED4.1 POWER_H.2 POWER_H.4 R29.2 VR4.2 | length 263.9
  Top Layer w0.1: LED4.1@57.25,98 65.828,106.578 v1(72.009,106.578) ; v1(79.502,101.778) 80.95,100.33 82.906,100.33 83.46,99.776 E11.1@83.46,98.6 ; v1(93.735,104.4) C12.2@93.735,106 ; v1(93.735,111.4) C13.2@93.735,113 ; v3@95.675,112.975 v3(95.75,113.05) ; v1(103.06,109.3) R29.2@103.06,111 ; FPGA.M7@181.3,163.85 181.3,164.104 181.554,164.104 v1(181.7,164.25) FPGA.L8@182.1,164.65 ; FPGA.G7@181.3,167.85 181.7,168.25 182.347,168.25 182.55,168.046 v1@182.55,167.4 ; FPGA.J8@182.1,166.25 FPGA.K9@182.9,165.45 v1(182.5,165.05) ; v1(182.5,167.45) v1@182.55,167.4 ; FPGA.H9@182.9,167.05 v1@182.55,167.4 ; FPGA.L10@183.7,164.65 184.1,164.25 184.108,164.258 v1(184.209,164.258) ; FPGA.J10@183.7,166.25 v1(184.1,166.65) ; FPGA.K11@184.5,165.45 v1(184.9,165.05) ; FPGA.H11@184.5,167.05 v1(184.9,167.45) ; FPGA.M12@185.3,163.85 v1(185.7,163.45) ; v1(186.725,177.85) 192.575,177.85 v1(194.7,175.725) v1@194.7,175.7 ; v1(195.45,148.15) 195.45,152.025 v1(196.05,152.625)
  Mid-Layer 1 w0.1: v3(95.75,113.05) 95.75,114.812 99.46,118.522 99.46,119.017 98.835,119.642 98.835,136.535 103.9,141.6 103.9,143.312 103.812,143.4 103.367,143.4 101.36,145.407 101.36,145.413 94.36,152.413 94.36,188.373 93.833,188.9 93.833,189.64 94.36,190.167 94.36,190.913 93.833,191.44 93.827,191.44 92.56,192.707 92.56,214.06 97.18,218.68 97.18,228.373 97.707,228.9 97.713,228.9 99.72,230.907 99.72,230.913 100.247,231.44 100.993,231.44 101.52,230.913 101.52,230.167 100.993,229.64 100.987,229.64 99.72,228.373 99.72,222.167 100.247,221.64 100.993,221.64 101.893,222.54 POWER_H.2@104,222.54 POWER_H.4@106.54,222.54
  Bottom Layer w0.1: C26.1@168,176.6 C24.1@174,176.6 C23.1@180,176.6 C22.1@187,176.6 187,177.575 v1(186.725,177.85) ; v1@194.625,175.775 194.625,183.025 195.275,183.025 195.4,182.9 C21.1@195.4,181 C20.1@195.4,174 C10.1@195.4,168 C9.1@195.4,162 C8.1@195.4,156.007 ; v1@195.4,148.225 C25.1@195.4,150 195.4,150.825 195.402,150.825 195.402,156.007 C8.1@195.4,156.007 ; C8.1@195.4,156 C8.1@195.4,156.007